# Altium PCB MCXE31B.PcbDoc (part 1 of 3)
Units mil, origin at the board's own origin, x right, y up, seen from the top; angles counter-clockwise.
Board outline 4645.67 x 2165.35 mil, 4 copper layers (TOP, GND, POWER, BOTTOM), stack 60.805 mil thick; 220 components, 156 nets, 796 pads, 319 vias.
Unrouted connection lines stored in the file: 10.
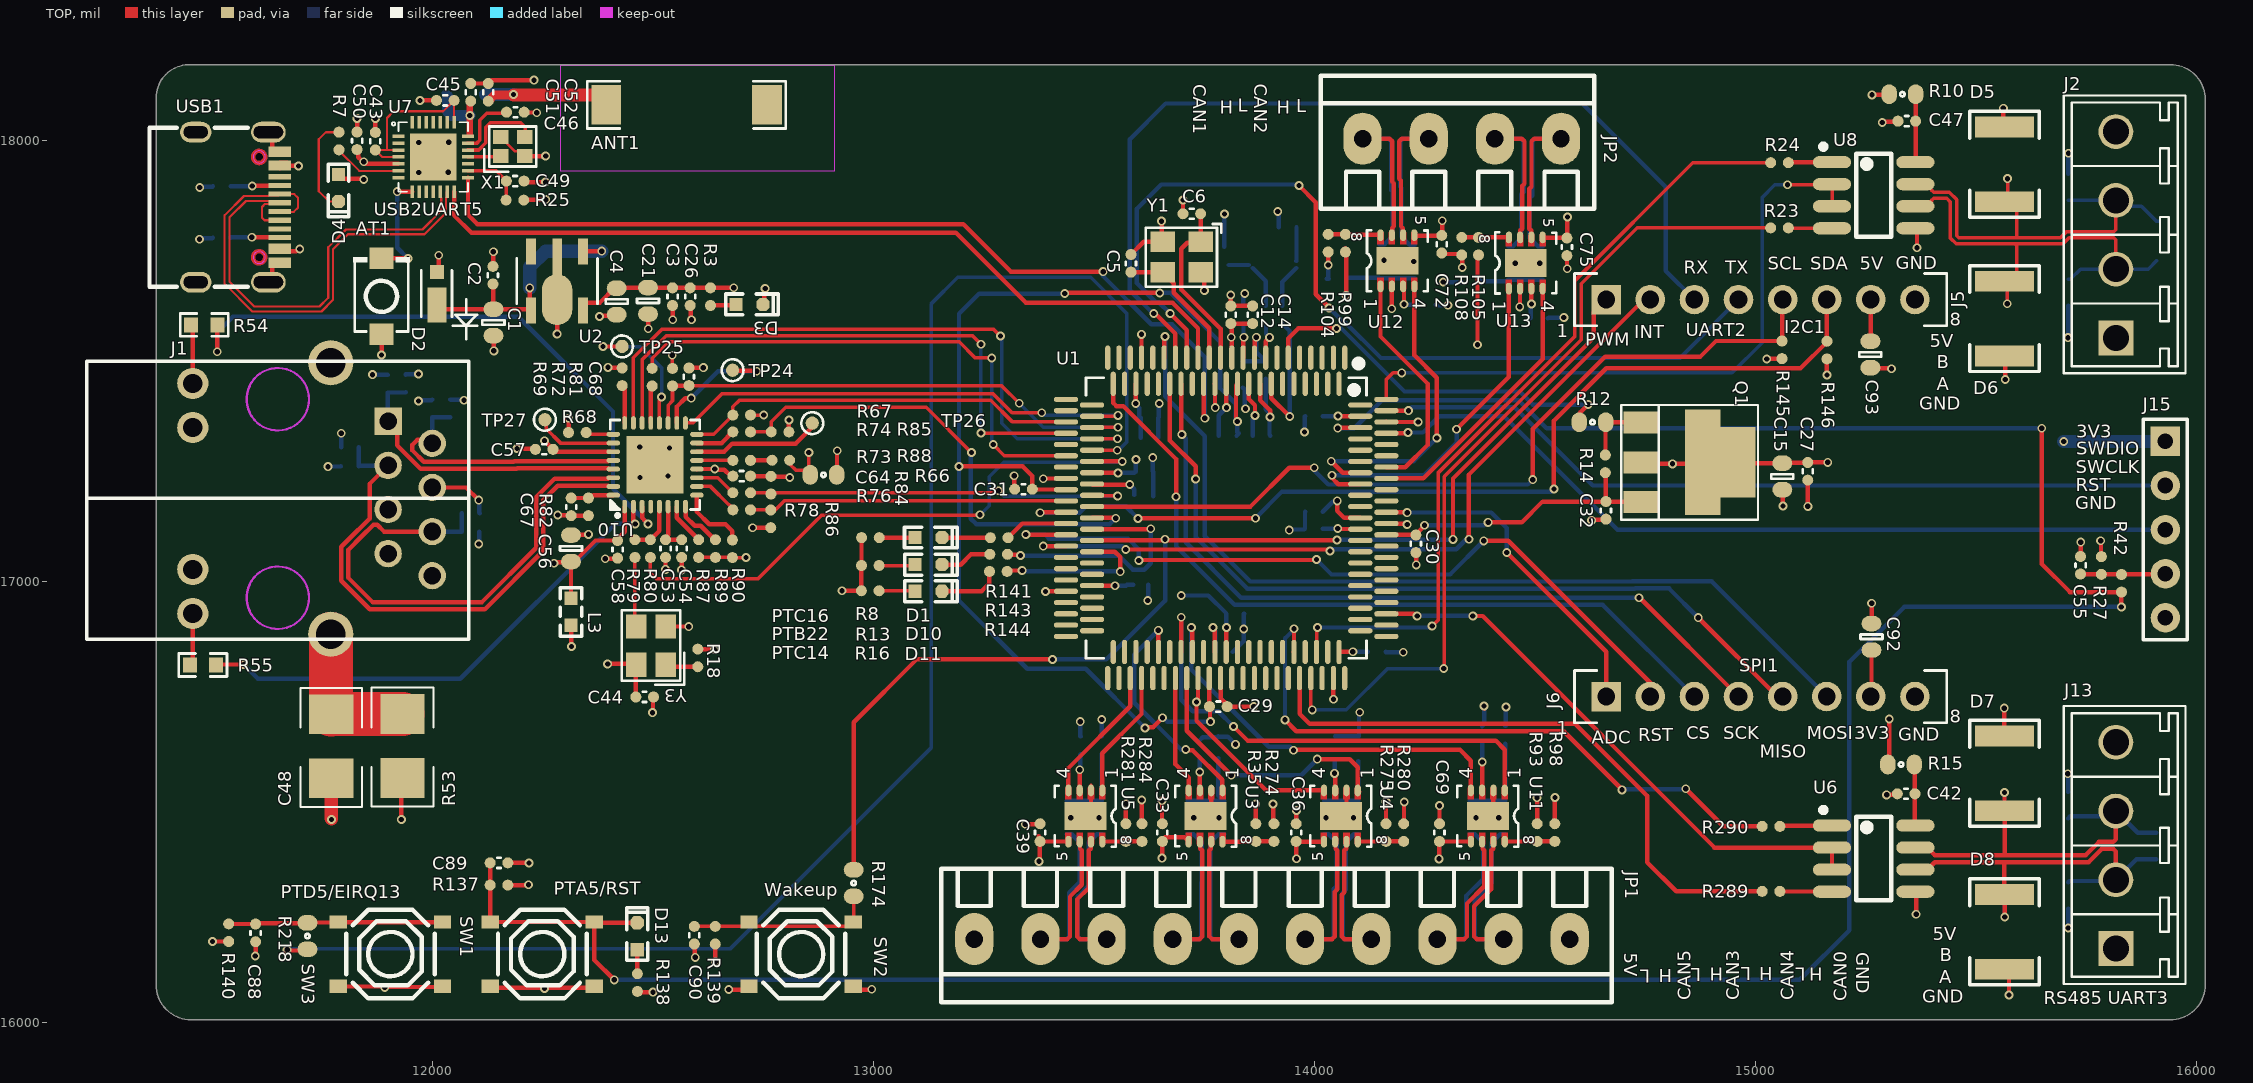
[diagram p0: TOP view]
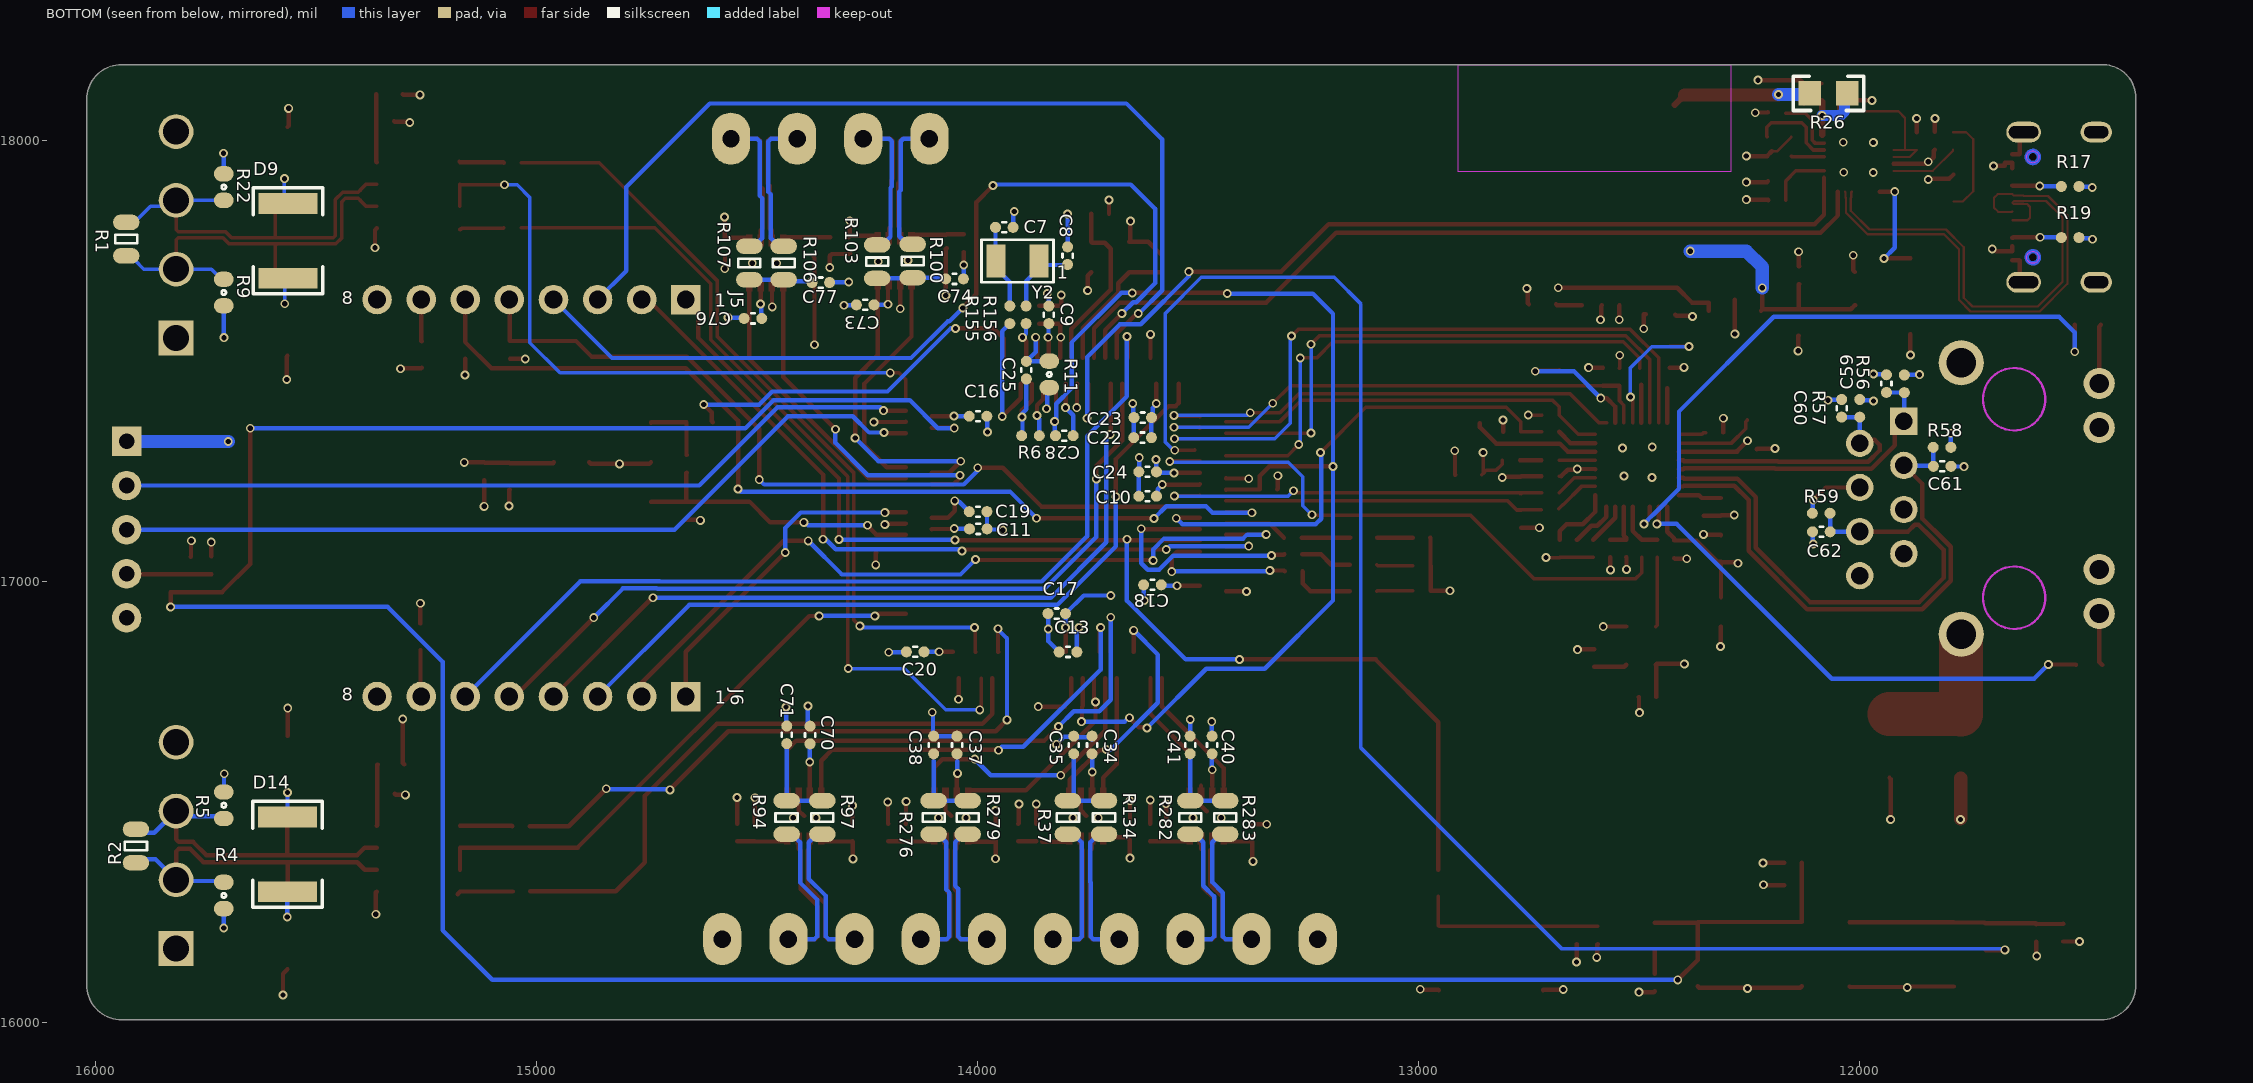
[diagram p1: BOTTOM view, seen from below]
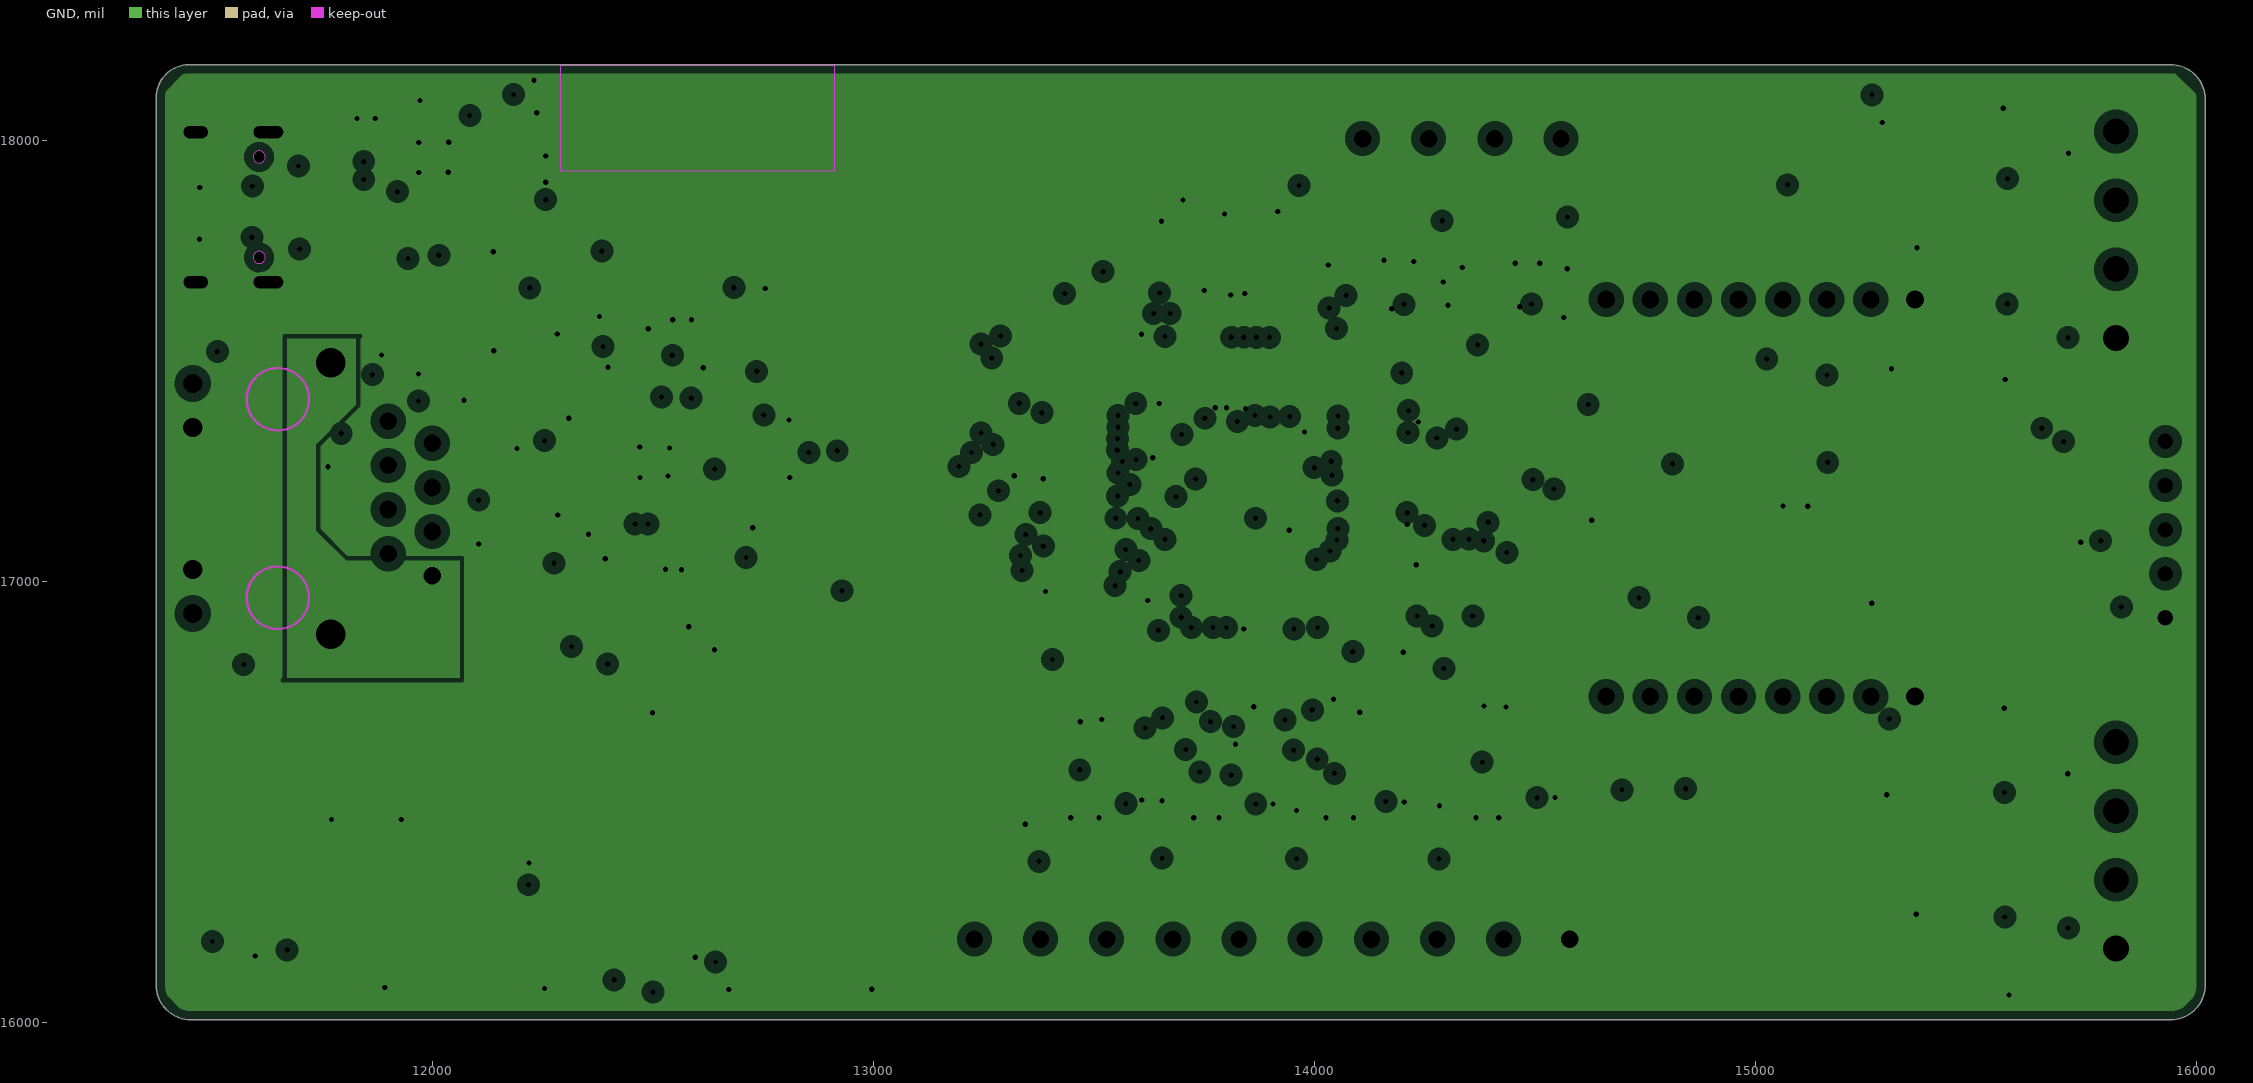
[diagram p2: GND, clearances drawn from the general rule]
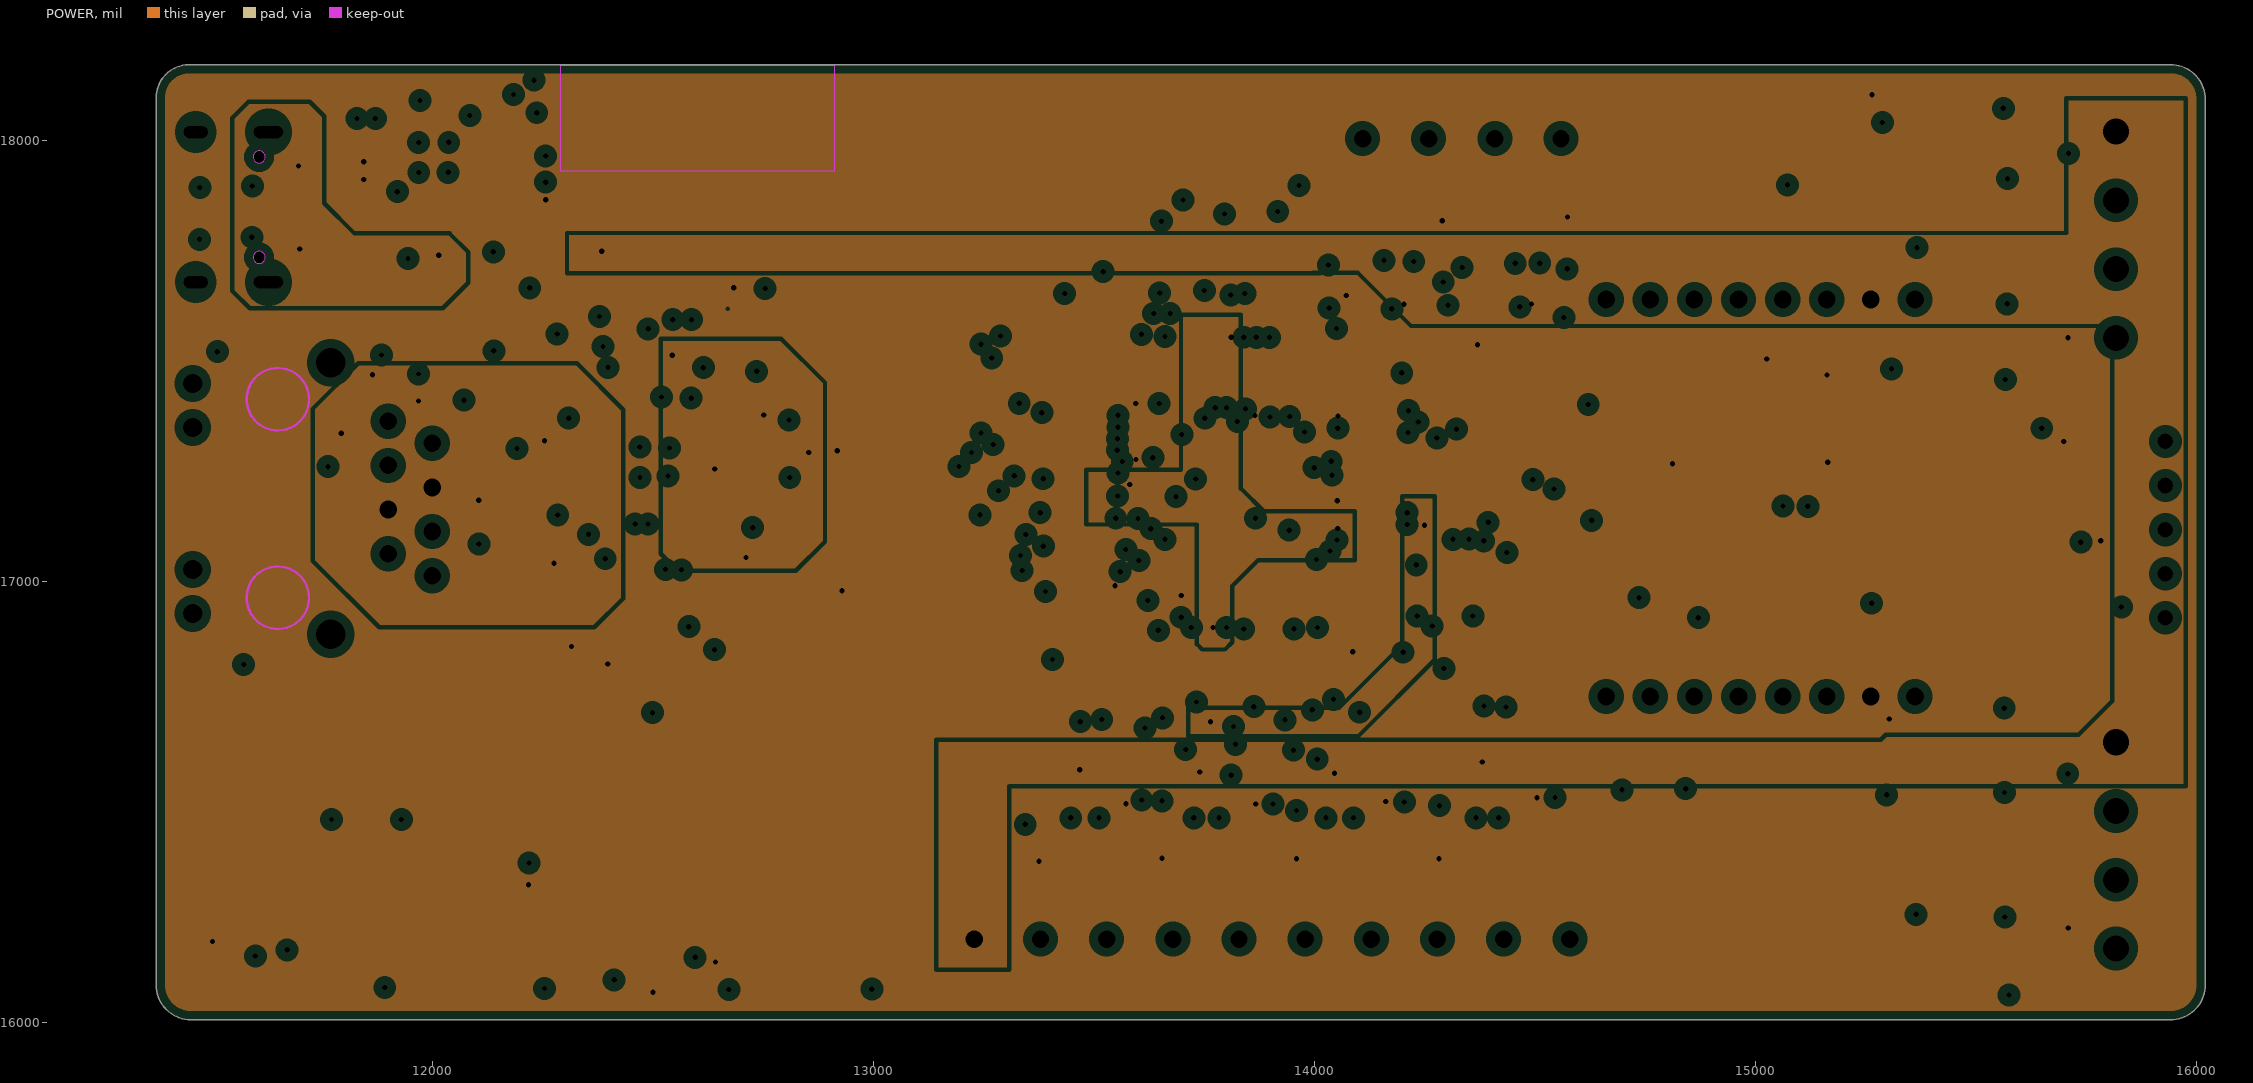
[diagram p3: POWER, clearances drawn from the general rule]

## Layer stack, top to bottom
Top Solder: solder mask 0.4, Solder Resist, Dk 3.5
TOP: signal copper 1.8
Dielectric 1: core 3.0099, FR-4, Dk 4.5
GND: plane copper 1.3779, net (Multiple Nets)
Dielectric2: core 48.4299, FR-4, Dk 3.5
POWER: plane copper 1.3779, net (Multiple Nets)
Dielectric3: core 3.0099, FR-4, Dk 3.5
BOTTOM: signal copper 1.8
Bottom Solder: solder mask 0.4, Solder Resist, Dk 3.5

## Board outline
15803.19,18172.68 15940.99,18172.68 cw(c15940.99,18093.94) 16019.73,18093.94 16019.73,16086.06 cw(c15940.99,16086.06) 15940.99,16007.32 15822.88,16007.32 11826.82,16007.32 11452.8,16007.32 cw(c11452.8,16086.06) 11374.06,16086.06 11374.06,18097.24 cw(c11449.56,18097.24) 11446.32,18172.68

## Design rules (kind name [scope] priority, off if disabled: settings)
Clearance [All] p1: gap=6 ignorepadtopadclearanceinfootprint=TRUE except(0: Arc-Text Arc-Hole Track-Text Track-Hole SMDPad-Text SMDPad-Hole THPad-Text THPad-Hole Via-Text Via-Hole Fill-Text Fill-Hole Poly-Text Poly-Hole Region-Text Region-Hole Text-Text Text-Hole; 2: Arc-SMDPad Track-SMDPad SMDPad-SMDPad)
ComponentClearance [All] p1: gap=0 collisioncheckmode=3 verticalgap=0 showdistances=FALSE
DiffPairsRouting [All] p1: maxlimit=10 minlimit=6 mostfreqgap=10 toplayer_prefgap=6 toplayer_minwidth=3 toplayer_maxwidth=15 toplayer_prefwidth=5 bottomlayer_minwidth=3 bottomlayer_maxwidth=15 bottomlayer_prefwidth=15 maxuncoupledlength=500
HoleToHoleClearance [All] p1: gap=5 allowstackedmicrovias=TRUE
MinimumSolderMaskSliver [All] p1: minsoldermaskwidth=0
PlaneClearance [All] p1: clearance=20
PlaneConnect [All] p1: planeconnectstyle=Direct reliefexpansion=20 reliefentries=4 reliefconductorwidth=10 reliefairgap=10
PolygonConnect [All] p1: connectstyle=Direct reliefconductorwidth=10 reliefentries=4 polygonreliefangle="90 Angle" airgapwidth=10
RoutingVias [All] p1: holewidth=12 width=20 viastyle="Through Hole" minholewidth=0 minwidth=0 maxholewidth=50 maxwidth=100
SilkToSilkClearance [All] p1: silktosilkclearance=0
SilkToSolderMaskClearance [IsPad] p1: minsilkscreentomaskgap=0 clearancetoexposedcopper=TRUE
SolderMaskExpansion [All] p1: expansion=4
Width [All] p1: maxlimit=100 minlimit=3 preferedwidth=8 minimp=50.000000 maximp=50.000000 favimp=50.000000
22 further rules are at their usual default settings.

## Classes and differential pairs
component class UART2: C47 D5 D6 D9 J2 R1 R9 R10 R22 R23 R24 U8
component class UART: ANT1 AT1 C42 C43 C45 C46 C49 C50 C51 C52 D4 D7 D8 D14 J13 R2 R4 R5 R7 R15 R17 R19 R25 R26 R289 R290 U6 U7 USB1 X1
component class CAN1: C33 C34 C35 C36 C37 C38 C39 C40 C41 JP1 R35 R37 R134 R274 R275 R276 R279 R280 R281 R282 R283 R284 TP21 TP38 TP39 TP41 TP42 TP44 U3 U4 U5
component class "13 HEADERS": C92 C93 J5 J6 R145 R146
component class "12 SWITCH & LED": C88 C89 C90 D1 D10 D11 D13 R8 R13 R16 R137 R138 R139 R140 R141 R143 R144 SW1 SW2 SW3
component class "10 CAN": C69 C70 C71 C72 C73 C74 C75 C76 C77 JP2 R93 R94 R97 R98 R99 R100 R103 R104 R105 R106 R107 R108 TP28 TP30 TP31 TP33 TP34 TP36 U11 U12 U13
component class "09 ETHERNET_ENET": C44 C48 C53 C54 C56 C57 C58 C59 C60 C61 C62 C64 C67 C68 J1 L3 R18 R53 R54 R55 R56 R57 R58 R59 R66 R67 R68 R69 R72 R73 R74 R76 R78 R79 R80 R81 R82 R84 R85 R86 R87 R88 R89 R90 TP22 TP23 TP24 TP25 TP26 TP27 TP45 U10 Y3 Y4
component class "08 MCU_LINK_DEBUG": C55 J15 R27
component class "06 MCU_PORT": R42 R174 R218
component class "05 MCU_C": C5 C6 C7 C8 C9 C10 C11 C12 C13 C14 C15 C16 C17 C18 C19 C20 C21 C22 C23 C24 C25 C26 C27 C28 C29 C30 C31 C32 Q1 R6 R11 R12 R14 R155 R156 TP12 TP14 TP46 TP47 Y1 Y2
component class "04 MCU_AB": U1
component class "03 POWER": C1 C2 C3 C4 D2 D3 J10 R3 U2

## Components (designator, comment, footprint, x,y, rotation, side; value= is the part's Value field where it differs from the comment)
ANT1 "AN9520-245" ANT-SMD_L9.5-W2.1 12576.75,18081.3 r0 top
AT1 "TS-1088-AR02016" SW-SMD_L3.9-W3.0-P4.45 11884.9,17647.3 r90 top
C1 "4.7uF" CC0603_OV 12138.7,17588.1 r270 top
C2 "0.1uF" CC0402_25 12137.55,17695.2 r90 top
C3 "0.1uF" CC0402_25 12544.7,17646.65 r270 top
C4 "4.7uF" CC0603_OV 12418.1,17635.85 r270 top
C5 "10pF" CC0402_25 13584.15,17722.1 r90 top
C6 "10pF" CC0402_25 13722,17834.5 r180 top
C7 "10pF" CC0402_25 13939.45,17803.75 r180 bottom
C8 "10pF" CC0402_25 13795.95,17739.5 r90 bottom
C9 "0.22uF" CC0402_25 13838.5,17605.5 r90 bottom
C10 "2.2uF" CC0402_25 13614.5,17194.15 r0 bottom
C11 "0.22uF" CC0402_25 13998.45,17120.05 r180 bottom
C12 "0.22uF" CC0402_25 13810.5,17605.5 r90 top
C13 "0.22uF" CC0402_25 13795,16841 r0 bottom
C14 "0.22uF" CC0402_25 13860,17605.5 r90 top
C15 "10uF" CC0603_OV 15060.95,17239.1 r270 top
C16 "0.22uF" CC0402_25 13999,17375.5 r180 bottom
C17 "0.22uF" CC0402_25 13820.5,16928 r0 bottom
C18 "0.22uF" CC0402_25 13603.55,16993.2 r0 bottom
C19 "0.22uF" CC0402_25 13998.9,17159.1 r180 bottom
C20 "0.22uF" CC0402_25 14141.4,16841.3 r0 bottom
C21 "10uF" CC0603_OV 12489.2,17637.15 r270 top
C22 "0.22uF" CC0402_25 13626,17326.95 r0 bottom
C23 "0.22uF" CC0402_25 13625.55,17372.45 r0 bottom
C24 "0.22uF" CC0402_25 13614.5,17249.5 r0 bottom
C25 "0.22uF" CC0402_25 13889.5,17480 r90 bottom
C26 "1uF" CC0402_25 12584.7,17646.65 r270 top
C27 "0.22uF" CC0402_25 15118.45,17250.7 r270 top
C28 "0.22uF" CC0402_25 13803.35,17331.35 r180 bottom
C29 "0.22uF" CC0402_25 13782.15,16717.1 r0 top
C30 "0.22uF" CC0402_25 14230.05,17086.3 r270 top
C31 "0.22uF" CC0402_25 13340.45,17210.1 r180 top
C32 "2.2uF" CC0402_25 14661,17162 r270 top
C33 "1uF" CC0402_25 13655.24,16431.55 r90 top
C34 "1uF" CC0402_25 13740.55,16630.16 r90 bottom
C35 "0.01UF" CC0402_25 13782.05,16630.16 r90 bottom
C36 "1uF" CC0402_25 13958.65,16431.55 r90 top
C37 "1uF" CC0402_25 14046.65,16630.16 r90 bottom
C38 "0.01UF" CC0402_25 14099.55,16630.16 r90 bottom
C39 "1uF" CC0402_25 13378,16431.55 r90 top
C40 "1uF" CC0402_25 13468.35,16630.16 r90 bottom
C41 "0.01UF" CC0402_25 13518.09,16630.16 r90 bottom
C42 "100nF" CC0402_25 15341.5,16519.5 r180 top
C43 "2.2uf,±5%" CC0402_25 11871,17999 r270 top
C44 "0.1uF" CC0402_25 12481.5,16739 r0 top
C45 "0.1uf,±5%" CC0402_25 12029.5,18091.5 r180 top
C46 "2.2uf,±5%" CC0402_25 12188.4,18064.75 r0 top
C47 "100nF" CC0402_25 15343,18044.5 r180 top
C48 "10nF 500V" 1210 11771,16699.5 r270 top
C49 "2.2uf,±5%" CC0402_25 12188,17908.5 r180 top
C50 "2.2uf,±5%" CC0402_25 11829.5,18000 r270 top
C51 "2.2uf,±5%" CC0402_25 12087.25,18109.9 r90 top
C52 "2.2uf,±5%" CC0402_25 12127,18109.9 r90 top
C53 "470pF" CC0402_25 12529,17075.5 r270 top
C54 "1uF" CC0402_25 12565.5,17075.5 r270 top
C55 "0.1uF" CC0402_25 15736.9,17037.65 r90 top
C56 "22uF" CC0603_OV 12314.5,17076 r90 top
C57 "0.1uF" CC0402_25 12253.8,17300.45 r180 top
C58 "0.1uF" CC0402_25 12420.25,17073.65 r270 top
C59 "15PF" CC0402_25 11939.5,17449.5 r90 bottom
C60 "15PF" CC0402_25 12041,17393.5 r90 bottom
C61 "15PF" CC0402_25 11813,17262 r180 bottom
C62 "15PF" CC0402_25 12087,17113.5 r0 bottom
C64 "0.1uF" CC0402_25 12701.5,17239.75 r0 top
C67 "100PF" CC0402_25 12315,17170 r270 top
C68 "10uF" CC0402_25 12582,17464.95 r90 top
C69 "1uF" CC0402_25 14283.5,16431.55 r90 top
C70 "1uF" CC0402_25 14379.9,16652.7 r90 bottom
C71 "0.01UF" CC0402_25 14432.65,16653.2 r90 bottom
C72 "1uF" CC0402_25 14288.75,17765.45 r270 top
C73 "1uF" CC0402_25 14254.8,17628 r0 bottom
C74 "0.01UF" CC0402_25 14052.2,17686.85 r180 bottom
C75 "1uF" CC0402_25 14572.35,17759.45 r270 top
C76 "1uF" CC0402_25 14509.3,17597.2 r0 bottom
C77 "0.01UF" CC0402_25 14355.45,17678.55 r180 bottom
C88 "0.1uF" CC0402_25 11599.55,16204.1 r270 top
C89 "0.1uF" CC0402_25 12151.3,16362.9 r0 top
C90 "0.1uF" CC0402_25 12594.1,16198.9 r270 top
C92 "10uF" CC0603_OV 15263,16875.5 r90 top
C93 "10uF" CC0603_OV 15260.5,17515.5 r270 top
D1 "POWER LED" "LED 0603R" 13124.8,17100.5 r0 top
D2 "MSS1P3L" SMB_2P7X1P4 12010.3,17653.35 r90 top
D3 "POWER LED" "LED 0603R" 12719.3,17629 r0 top
D4 "" "LED 0603R" 11787.5,17893 r270 top
D5 "SMBJ6.5CA" 1812 15564.5,17946.5 r270 top
D6 "SMBJ6.5CA" 1812 15564.5,17597 r90 top
D7 "SMBJ6.5CA" 1812 15564.5,16565.85 r270 top
D8 "SMBJ6.5CA" 1812 15564.5,16206.5 r90 top
D9 "SMBJ6.5CA" 1812 15563.5,17773 r90 bottom
D10 "POWER LED" "LED 0603R" 13125.3,17039.05 r0 top
D11 "POWER LED" "LED 0603R" 13125.3,16978.8 r0 top
D13 "POWER LED" "LED 0603R" 12464.55,16196.55 r90 top
D14 "SMBJ6.5CA" 1812 15564.5,16382 r90 bottom
J1 "HR911105A" RJ45-HR911105A 11885,17189 r180 top
J2 "CON-4" GSP003RC-4-3.5 15817.13,17709 r90 top
J5 "SKT_1X8" CON_1X8_SKT_2P54_TH_126L 15011.48,17639.95 r90 top locked
J6 "SKT_1X8" CON_1X8_SKT_2P54_TH_126L 15011.48,16739.95 r90 top locked
J13 "CON-4" GSP003RC-4-3.5 15817.13,16324.5 r90 top
J15 "HDR_1X5" HDR2.54-Y-LI-5P 15929.35,17118.35 r270 top
JP1 "HDR-1X10" KF128-3.81-10P 13903.9,16190.1 r180 top
JP2 "HDR-1X4" KF128-3.81-4P 14334.2,18004.75 r0 top
L3 "100 OHM@100MHZ" "L 0603_L" 12314.5,16932 r90 top
Q1 "BCP56-16TX" SOT223 14740.5,17361 r270 top
R1 "120Ω" RC0805_OV 15930.15,17777.1 r90 bottom
R2 "120Ω" RC0805_OV 15908.15,16401.1 r90 bottom
R3 "470" RC0402_25 12630.7,17646.65 r270 top
R4 "4.7k" RC0603_OV 15709,16289 r270 bottom
R5 "4.7k" RC0603_OV 15709,16493.5 r270 bottom
R6 "0" RC0402_25 13880.1,17331.35 r0 bottom
R7 "5k1" RC0402_25 11788.5,17999.5 r90 top
R8 "470" RC0402_25 12993.4,17100.2 r0 top
R9 "4K7" RC0603_OV 15709,17656 r270 bottom
R10 "10K" RC0603_OV 15333,18105.5 r180 top
R11 "0" RC0603_OV 13837.5,17470.5 r90 bottom
R12 "0" RC0603_OV 14630.5,17362 r0 top
R13 "470" RC0402_25 12993.15,17037 r0 top
R14 "2.2K" RC0402_25 14659.5,17267.5 r270 top
R15 "10K" RC0603_OV 15330,16586 r180 top
R16 "470" RC0402_25 12992.95,16979.8 r0 top
R17 "5k1" RC0402_25 11523,17896.5 r180 bottom
R18 "NC" RC0402_25 12602,16827.5 r90 top
R19 "5k1" RC0402_25 11523,17780.5 r0 bottom
R22 "4k7" RC0603_OV 15709,17895 r270 bottom
R23 "0" RC0402_25 15054.45,17802.5 r180 top
R24 "0" RC0402_25 15054.45,17950.3 r180 top
R25 "5k1" RC0402_25 12187.5,17865.5 r180 top
R26 "0" 0805R 12113.3,18107.6 r180 bottom
R27 "10K" RC0402_25 15784.1,17037.1 r270 top
R35 "NC" RC0402_25 13867.24,16431.55 r270 top
R37 "62" RC0805_OV 13795.24,16465.88 r90 bottom
R42 "0" RC0402_25 15829.7,16996.75 r90 top
R53 "1M" 1210 11932.5,16700.5 r270 top
R54 "470Ω" R0603 11483,17582.5 r0 top
R55 "470Ω" R0603 11480,16811.5 r0 top
R56 "49.9" RC0402_25 11899,17449 r270 bottom
R57 "49.9" RC0402_25 12000,17393.5 r270 bottom
R58 "49.9" RC0402_25 11813.5,17305 r0 bottom
R59 "49.9" RC0402_25 12087.5,17155.5 r180 bottom
R66 "0" RC0603_OV 12886.95,17242.6 r0 top
R67 "1.5K" RC0402_25 12701.5,17378 r180 top
R68 "4.7K" RC0402_25 12329,17338.5 r0 top
R69 "4.7K" RC0402_25 12430.65,17464.95 r270 top
R72 "33" RC0402_25 12498.65,17464 r270 top
R73 "33" RC0402_25 12701.5,17275.5 r180 top
R74 "33" RC0402_25 12701.5,17340 r180 top
R76 "33" RC0402_25 12701.5,17202.05 r180 top
R78 "33" RC0402_25 12701.6,17163.25 r180 top
R79 "33" RC0402_25 12459.5,17075.5 r270 top
R80 "0" RC0402_25 12494.5,17075.5 r270 top
R81 "10K" RC0402_25 12544.65,17463.95 r270 top
R82 "12.1K" RC0402_25 12354,17170 r270 top
R84 "NC" RC0402_25 12767.85,17219.25 r90 top
R85 "NC" RC0402_25 12788.5,17340 r0 top
R86 "NC" RC0402_25 12767.45,17142.9 r270 top
R87 "NC" RC0402_25 12604,17075.5 r270 top
R88 "NC" RC0402_25 12790.3,17275.7 r0 top
R89 "NC" RC0402_25 12642,17075.5 r270 top
R90 "4.7K" RC0402_25 12680.5,17075 r270 top
R93 "NC" RC0402_25 14505,16431.55 r270 top
R94 "62" RC0805_OV 14433,16465.88 r90 bottom
R97 "62" RC0805_OV 14352,16465.88 r270 bottom
R98 "100K" RC0402_25 14545,16431.55 r90 top
R99 "NC" RC0402_25 14070.25,17767.9 r90 top
R100 "62" RC0805_OV 14147.25,17727.4 r270 bottom
R103 "62" RC0805_OV 14227.75,17725.9 r90 bottom
R104 "100K" RC0402_25 14031.25,17767.9 r270 top
R105 "NC" RC0402_25 14372,17761 r90 top
R106 "62" RC0805_OV 14439.55,17722.91 r270 bottom
R107 "62" RC0805_OV 14517.55,17722.91 r90 bottom
R108 "100K" RC0402_25 14334,17761 r270 top
R134 "62" RC0805_OV 13713.24,16465.88 r270 bottom
R137 "10K" RC0402_25 12151.3,16312.5 r180 top
R138 "470" RC0402_25 12465.05,16091.55 r90 top
R139 "10K" RC0402_25 12641.6,16198.9 r90 top
R140 "10K" RC0402_25 11538.55,16204.6 r90 top
R141 "470" RC0402_25 13285.35,17100.05 r0 top
R143 "470" RC0402_25 13284.15,17062.5 r0 top
R144 "470" RC0402_25 13283.4,17023.75 r0 top
R145 "4.7K" RC0402_25 15060,17526 r90 top
R146 "4.7K" RC0402_25 15162,17525.5 r90 top
R155 "0" RC0402_25 13927,17605.5 r270 bottom
R156 "0" RC0402_25 13890,17605.5 r270 bottom
R174 "0" RC0603_OV 12955.4,16317.1 r270 top
R218 "0" RC0603_OV 11717.05,16197 r90 top
R274 "100K" RC0402_25 13908.24,16431.55 r90 top
R275 "NC" RC0402_25 14162.45,16431.55 r270 top
R276 "62" RC0805_OV 14099.45,16465.88 r90 bottom
R279 "62" RC0805_OV 14022.45,16465.88 r270 bottom
R280 "100K" RC0402_25 14202.45,16431.55 r90 top
R281 "NC" RC0402_25 13572.6,16431.55 r270 top
R282 "62" RC0805_OV 13517.59,16465.88 r90 bottom
R283 "62" RC0805_OV 13438.59,16465.88 r270 bottom
R284 "100K" RC0402_25 13609.1,16431.55 r90 top
R289 "0" RC0402_25 15035.2,16298.35 r180 top
R290 "0" RC0402_25 15035.2,16445.7 r180 top
SW1 "SW SPST NO" SW-SMD_4P-L5.1-W5.1-P3.70-LS6.5-TL_H1.5 12247.25,16156.4 r180 top
SW2 "SW SPST NO" SW-SMD_4P-L5.1-W5.1-P3.70-LS6.5-TL_H1.5 12834.1,16156.4 r180 top
SW3 "SW SPST NO" SW-SMD_4P-L5.1-W5.1-P3.70-LS6.5-TL_H1.5 11902.9,16156.4 r180 top
TP24 "TPAD_030" TPAD_030 12680.95,17479.85 r270 top
TP25 "TPAD_030" TPAD_030 12430.4,17533.85 r270 top
TP26 "TPAD_030" TPAD_030 12861.55,17359.8 r270 top
TP27 "TPAD_030" TPAD_030 12255.4,17367.55 r270 top
U1 "MCXE31BMPB" QFP-172_L16.0-W16.0-P0.65-LS19.0-TL 13800,17145 r270 top
U2 "XC6227C331PR-G" XC6227C331PR-G 12282.99,17639.7 r90 top
U3 "TJA1057BTK" SON8_0P65_3P15X3P15 13753.35,16469.05 r270 top
U4 "TJA1057BTK" SON8_0P65_3P15X3P15 14059.95,16469.05 r270 top
U5 "TJA1057BTK" SON8_0P65_3P15X3P15 13480.7,16469.05 r270 top
U6 "SP3485" SOP-8 15268,16372.5 r270 top
U7 "CH9143" QFN-28_L4.0-W4.0-P0.40-BL-EP2.7 12002.26,17963.26 r270 top
U8 "SP3485" SOP-8 15268,17876.5 r270 top
U10 "LAN8741A-EN" QFN-32-EP(5x5) 12505.22,17265.47 r0 top
U11 "TJA1057BTK" SON8_0P65_3P15X3P15 14393.11,16469.05 r270 top
U12 "TJA1057BTK" SON8_0P65_3P15X3P15 14188.29,17727.88 r90 top
U13 "TJA1057BTK" SON8_0P65_3P15X3P15 14479.17,17722.84 r90 top
USB1 "KH-TYPE-C-16P" USB-C-SMD_KH-TYPE-C-16P 11654,17804.59 r270 top
X1 "32MHz" CRYSTAL-SMD_4P-L2.0-W1.6-BL 12182.5,17987 r0 top
Y1 "16MHz" X322516MLB4SI 13742.5,17770.9 r180 top
Y2 "32.768KHz" XTAL2-3P2X1P5-SM 13909.5,17727.5 r0 bottom
Y3 "50 MHz" OSC-SMD_4P-L3.2-W2.5-BL 12496,16856.5 r90 top

## Footprints (in the part's own frame and the unit in brackets; to place one, negate y for a bottom-side part, rotate by r counter-clockwise, add the part's x,y. Pads: shape width x height; smd on the part's side, far side on the other; paste and mask are expansions set on the pad)
0805R [mil]
  rect 52x56 smd: 1(0,0) 2(85,0)
  silkscreen extent -37,-39 122,39
1210 [mil]
  rect 90x100 smd: 1(0,0) 2(145,0)
  silkscreen extent -60,-70 210,70
1812 [mm]
  rect 1.2x3.42 smd: 1(-2.15,0) 2(2.15,0)
  silkscreen extent -3.05,-2.01 3.05,2.01, body extent -2.25,-1.6 2.25,1.6, height 0.59
ANT-SMD_L9.5-W2.1 [mm]
  rect 1.71x2.268 smd paste-100 mask+0.051: 1(-4.63,0) 2(4.63,0)
  silkscreen extent -5.71,-1.36 5.71,1.36
CC0402_25 [mil]
  round 25 smd: 1(-20,0) 2(20,0)
  silkscreen extent -4,-12 4,12
CC0603_OV [mil]
  oval 35x45 smd: 1(-30,0) 2(30,0)
  silkscreen extent -5,-25 5,25
CON_1X8_SKT_2P54_TH_126L [mil]
  rect 67x67 / inner round 0 / far side rect 67x67 hole 40: 1(0.05,349.98)
  round 67 / inner round 0 / far side round 67 hole 40: 2(0.05,249.98) 3(0.05,149.98) 4(0.05,49.98) 5(0.05,-50.02) 6(0.05,-150.02) 7(0.05,-250.02) 8(0.05,-350.02)
  silkscreen extent -59,-422 59,422
CRYSTAL-SMD_4P-L2.0-W1.6-BL [mm]
  rect 0.9x0.8 smd paste+0.051: 1(-0.7,-0.55) 2(0.7,-0.55) 3(0.7,0.55) 4(-0.7,0.55)
  silkscreen extent -1.65,-1.45 1.35,1.15
GSP003RC-4-3.5 [mm]
  rect 2x2 hole 1.5: 1(-3.96,0)
  round 2 hole 1.5: 2(0,0) 3(3.96,0) 4(7.92,0)
  silkscreen extent -6,-4 10,3
HDR2.54-Y-LI-5P [mm] "圆孔排母，5脚"
  rect 1.7x1.7 hole 0.9: 1(-5.08,0)
  round 1.7 hole 0.9: 2(-2.54,0) 3(0,0) 4(2.54,0) 5(5.08,0)
  silkscreen extent -6.35,-1.27 6.35,1.27, body extent -6.35,-1.27 6.35,1.27, height 4.31
KF128-3.81-4P [mm] "螺钉式接线端子，脚距3.81mm"
  oval 2.2x3 hole 1: 1(-5.715,0) 2(-1.905,0) 3(1.905,0) 4(5.715,0)
  silkscreen extent -8.13,-4.04 7.62,3.63, body extent -8.12,-3.9 7.62,3.5, height 8.55
KF128-3.81-10P [mm] "螺钉式接线端子，脚距3.81mm"
  oval 2.2x3 hole 1: 1(-17.145,0) 2(-13.335,0) 3(-9.525,0) 4(-5.715,0) 5(-1.905,0) 6(1.905,0) 7(5.715,0) 8(9.525,0) 9(13.335,0) 10(17.145,0)
  silkscreen extent -19.56,-4.04 19.05,3.63, body extent -19.55,-3.9 19.05,3.5, height 8.55
"L 0603_L" [mil] "小功率贴片电感"
  rect 30x30 smd: 1(-30.59,0) 2(30.59,0)
  silkscreen extent -55,-24 55,24, body extent -31,-16 32,16, height 31
"LED 0603R" [mil] "红色0603LED"
  rect 30x30 smd: 1(-30.59,0)
  oct 30x30 smd: 2(30.59,0)
  silkscreen extent -54,-24 65,24, body extent -31,-16 32,16, height 24
OSC-SMD_4P-L3.2-W2.5-BL [mm]
  rect 1.4x1.2 smd: 1(-1.129,-0.848) 2(1.071,-0.848) 3(1.071,0.852) 4(-1.129,0.852)
  silkscreen extent -2.29,-1.91 2,1.68
QFN-28_L4.0-W4.0-P0.40-BL-EP2.7 [mm]
  rect 0.2x0.7 smd paste-100 mask+0.051: 1(-1.2,-2) 2(-0.8,-2) 3(-0.4,-2) 4(-0.001,-2) 5(0.4,-2) 6(0.8,-2) 7(1.2,-2) 15(1.2,2) 16(0.8,2) 17(0.4,2) 18(0,2) 19(-0.4,2) 20(-0.8,2) 21(-1.2,2)
  rect 0.7x0.2 smd paste-100 mask+0.051: 8(2,-1.2) 9(2,-0.8) 10(2,-0.4) 11(1.999,0) 12(2,0.4) 13(2,0.8) 14(2,1.2) 22(-2,1.2) 23(-2,0.8) 24(-2,0.4) 25(-2,0) 26(-2,-0.4) 27(-2,-0.8) 28(-2,-1.2)
  rect 2.7x2.7 smd paste-100 mask+0.051: 29(0,0)
  silkscreen extent -2,-2.38 2,2
QFN-32-EP(5x5) [mm]
  oval 0.28x0.78 smd paste-100 mask+0.051: 1(-1.75,-2.407) 2(-1.25,-2.407) 3(-0.75,-2.407) 4(-0.25,-2.407) 5(0.25,-2.407) 6(0.75,-2.407) 7(1.25,-2.407) 8(1.75,-2.407) 17(1.75,2.407) 18(1.25,2.407) 19(0.75,2.407) 20(0.25,2.407) 21(-0.25,2.407) 22(-0.75,2.407) 23(-1.25,2.407) 24(-1.75,2.407)
  oval 0.78x0.28 smd paste-100 mask+0.051: 9(2.407,-1.75) 10(2.407,-1.25) 11(2.407,-0.75) 12(2.407,-0.25) 13(2.407,0.25) 14(2.407,0.75) 15(2.407,1.25) 16(2.407,1.75) 25(-2.407,1.75) 26(-2.407,1.25) 27(-2.407,0.75) 28(-2.407,0.25) 29(-2.407,-0.25) 30(-2.407,-0.75) 31(-2.407,-1.25) 32(-2.407,-1.75)
  rect 3.3x3.3 smd paste-100 mask+0.051: 33(0,0)
  silkscreen extent -2.58,-3.02 2.58,2.58
QFP-172_L16.0-W16.0-P0.65-LS19.0-TL [mm]
  oval 1.4x0.3 smd paste+0.051: 1(-9.225,6.825) 2(-7.723,6.5) 3(-9.225,6.175) 4(-7.723,5.85) 5(-9.225,5.525) 6(-7.723,5.2) 7(-9.225,4.875) 8(-7.723,4.55) 9(-9.225,4.225) 10(-7.723,3.9) 11(-9.225,3.575) 12(-7.723,3.25) 13(-9.225,2.925) 14(-7.723,2.6) 15(-9.225,2.275) 16(-7.723,1.95) 17(-9.225,1.625) 18(-7.723,1.3) 19(-9.225,0.975) 20(-7.723,0.65) 21(-9.225,0.325) 22(-7.723,0) 23(-9.225,-0.325) 24(-7.723,-0.65) 25(-9.225,-0.975) 26(-7.723,-1.3) 27(-9.225,-1.625) 28(-7.723,-1.95) 29(-9.225,-2.275) 30(-7.723,-2.6) 31(-9.225,-2.925) 32(-7.723,-3.25) 33(-9.225,-3.575) 34(-7.723,-3.9) 35(-9.225,-4.225) 36(-7.723,-4.55) 37(-9.225,-4.875) 38(-7.723,-5.2) 39(-9.225,-5.525) 40(-7.723,-5.85) 41(-9.225,-6.175) 42(-7.723,-6.5) 43(-9.225,-6.825) 87(9.225,-6.825) 88(7.723,-6.5) 89(9.225,-6.175) 90(7.723,-5.85) 91(9.225,-5.525) 92(7.723,-5.2) 93(9.225,-4.875) 94(7.723,-4.55) 95(9.225,-4.225) 96(7.723,-3.9) 97(9.225,-3.575) 98(7.723,-3.25) 99(9.225,-2.925) 100(7.723,-2.6) 101(9.225,-2.275) 102(7.723,-1.95) 103(9.225,-1.625) 104(7.723,-1.3) 105(9.225,-0.975) 106(7.723,-0.65) 107(9.225,-0.325) 108(7.723,0) 109(9.225,0.325) 110(7.723,0.65) 111(9.225,0.975) 112(7.723,1.3) 113(9.225,1.625) 114(7.723,1.95) 115(9.225,2.275) 116(7.723,2.6) 117(9.225,2.925) 118(7.723,3.25) 119(9.225,3.575) 120(7.723,3.9) 121(9.225,4.225) 122(7.723,4.55) 123(9.225,4.875) 124(7.723,5.2) 125(9.225,5.525) 126(7.723,5.85) 127(9.225,6.175) 128(7.723,6.5) 129(9.225,6.825)
  oval 0.3x1.4 smd paste+0.051: 44(-6.825,-9.225) 45(-6.5,-7.723) 46(-6.175,-9.225) 47(-5.85,-7.723) 48(-5.525,-9.225) 49(-5.2,-7.723) 50(-4.875,-9.225) 51(-4.55,-7.723) 52(-4.225,-9.225) 53(-3.9,-7.723) 54(-3.575,-9.225) 55(-3.25,-7.723) 56(-2.925,-9.225) 57(-2.6,-7.723) 58(-2.275,-9.225) 59(-1.95,-7.723) 60(-1.625,-9.225) 61(-1.3,-7.723) 62(-0.975,-9.225) 63(-0.65,-7.723) 64(-0.325,-9.225) 65(0,-7.723) 66(0.325,-9.225) 67(0.65,-7.723) 68(0.975,-9.225) 69(1.3,-7.723) 70(1.625,-9.225) 71(1.95,-7.723) 72(2.275,-9.225) 73(2.6,-7.723) 74(2.925,-9.225) 75(3.25,-7.723) 76(3.575,-9.225) 77(3.9,-7.723) 78(4.225,-9.225) 79(4.55,-7.723) 80(4.875,-9.225) 81(5.2,-7.723) 82(5.525,-9.225) 83(5.85,-7.723) 84(6.175,-9.225) 85(6.5,-7.723) 86(6.825,-9.225) 130(6.825,9.225) 131(6.5,7.723) 132(6.175,9.225) 133(5.85,7.723) 134(5.525,9.225) 135(5.2,7.723) 136(4.875,9.225) 137(4.55,7.723) 138(4.225,9.225) 139(3.9,7.723) 140(3.575,9.225) 141(3.25,7.723) 142(2.925,9.225) 143(2.6,7.723) 144(2.275,9.225) 145(1.95,7.723) 146(1.625,9.225) 147(1.3,7.723) 148(0.975,9.225) 149(0.65,7.723) 150(0.325,9.225) 151(0,7.723) 152(-0.325,9.225) 153(-0.65,7.723) 154(-0.975,9.225) 155(-1.3,7.723) 156(-1.625,9.225) 157(-1.95,7.723) 158(-2.275,9.225) 159(-2.6,7.723) 160(-2.925,9.225) 161(-3.25,7.723) 162(-3.575,9.225) 163(-3.9,7.723) 164(-4.225,9.225) 165(-4.55,7.723) 166(-4.875,9.225) 167(-5.2,7.723) 168(-5.525,9.225) 169(-5.85,7.723) 170(-6.175,9.225) 171(-6.5,7.723) 172(-6.825,9.225)
  silkscreen extent -9.09,-8.08 8.08,8.08
R0603 [mil]
  rect 31.75x34.02 smd paste-3937.01 mask+2: 1(-29.66,0) 2(29.66,0)
  silkscreen extent -55,-26 55,26
RC0402_25 [mil]
  round 25 smd: 1(-20,0) 2(20,0)
RC0603_OV [mil]
  oval 35x45 smd: 1(-30,0) 2(30,0)
  silkscreen extent -5,-5 5,5
RC0805_OV [mil]
  oval 35x60 smd: 1(-38,0) 2(38,0)
  silkscreen extent -10,-25 10,25
RJ45-HR911105A [mm] "HR911105A"
  rect 1.575x1.575 hole 1.016: 1(-0.38,-4.445)
  round 1.575 hole 1.016: 2(-2.92,-3.175) 3(-0.38,-1.905) 4(-2.92,-0.635) 5(-0.38,0.635) 6(-2.92,1.905) 7(-0.38,3.175) 8(-2.92,4.445)
  round 1.8 hole 1.1: 9(10.87,-6.625) 10(10.87,-4.085) 11(10.87,4.085) 12(10.87,6.625)
  round 2.6 hole 1.7: 15(2.92,7.815) 16(2.92,-7.815)
  Keep-Out Layer circle w0.127: c5.97,5.715 r1.798
  Keep-Out Layer circle w0.127: c5.97,-5.715 r1.798
  silkscreen extent -5.02,-7.91 16.98,8.1
SMB_2P7X1P4 [mil]
  rect 32x32 smd: A(49.15,-0.59)
  rect 79x43 smd: C(-25.65,-0.59)
  silkscreen extent -103,-92 53,35
SON8_0P65_3P15X3P15 [mm]
  oval 0.675x0.35 smd: 1(-1.475,0.975) 2(-1.475,0.325) 3(-1.475,-0.325) 4(-1.475,-0.975) 5(1.475,-0.975) 6(1.475,-0.325) 7(1.475,0.325) 8(1.475,0.975)
  rect 1.6x2.413 smd: 9(0,0)
  TOP region: 0.962,1.15 1.637,1.15 1.637,0.8 0.962,0.8
  TOP region: 0.962,0.5 1.637,0.5 1.637,0.15 0.962,0.15
  TOP region: 0.962,-0.15 1.637,-0.15 1.637,-0.5 0.962,-0.5
  TOP region: 0.962,-0.8 1.637,-0.8 1.637,-1.15 0.962,-1.15
  TOP region: -0.962,0.8 -1.637,0.8 -1.637,1.15 -0.962,1.15
  TOP region: -0.962,0.15 -1.637,0.15 -1.637,0.5 -0.962,0.5
  TOP region: -0.962,-0.5 -1.637,-0.5 -1.637,-0.15 -0.962,-0.15
  TOP region: -0.962,-1.15 -1.637,-1.15 -1.637,-0.8 -0.962,-0.8
  silkscreen extent -1.75,-1.75 1.77,1.75
SOP-8 [mm]
  oval 0.7x2.2 smd: 1(-1.905,-2.4) 2(-0.635,-2.4) 3(0.635,-2.4) 4(1.905,-2.4) 5(1.905,2.4) 6(0.635,2.4) 7(-0.635,2.4) 8(-1.905,2.4)
  silkscreen extent -2.95,-3.05 2.4,1, body extent -2.5,-3.1 2.5,3.1, height 1.75
SOT223 [mil]
  rect 50x80 smd: 1(0,0) 2(90,0) 3(180,0)
  rect 160x80 smd: 4(90,220)
  rect 240x80 smd: 4(90,140)
  silkscreen extent -40,-45 220,265
SW-SMD_4P-L5.1-W5.1-P3.70-LS6.5-TL_H1.5 [mm]
  rect 1x0.75 smd paste+0.051: 1(-3.056,1.86) 2(2.944,1.86) 3(-3.056,-1.84) 4(2.944,-1.84)
  silkscreen extent -2.61,-2.54 2.49,2.56
SW-SMD_L3.9-W3.0-P4.45 [mm]
  rect 1.23x1.36 smd paste+0.051: 1(-2.185,0) 2(2.185,0)
  silkscreen extent -2.03,-1.62 2.25,1.62
TPAD_030 [mil]
  round 30 smd: 1(0,0)
  silkscreen extent -25,-25 25,25, body extent -15,-15 15,15, height 150
USB-C-SMD_KH-TYPE-C-16P [mm]
  oval 1.2x2 hole 0.7 slot 1.7 at 90 deg: 1(-5.46,-0.65) 2(3.18,-0.65)
  oval 1.2x1.8 hole 0.7 slot 1.4 at 90 deg: 3(-5.46,-4.83) 4(3.18,-4.83)
  rect 0.3x1.3 smd paste-100 mask+0.05: A1(-4.49,0) A4(-3.69,0) A5(-2.39,0) A6(-1.39,0) A7(-0.89,0) A8(0.11,0) A9(1.41,0) A12(2.21,0) B1(1.91,0) B4(1.11,0) B5(0.61,0) B6(-0.39,0) B7(-1.89,0) B8(-2.89,0) B9(-3.39,0) B12(-4.19,0)
  Keep-Out Layer board cut-out: -3.68,-1.18 -3.715,-1.028 -3.812,-0.906 -3.952,-0.839 -4.108,-0.839 -4.248,-0.906 -4.345,-1.028 -4.38,-1.18 -4.38,-1.18 -4.345,-1.332 -4.248,-1.454 -4.108,-1.521 -3.952,-1.521 -3.812,-1.454 -3.715,-1.332 -3.68,-1.18
  Keep-Out Layer board cut-out: 2.1,-1.18 2.065,-1.028 1.968,-0.906 1.828,-0.839 1.672,-0.839 1.532,-0.906 1.435,-1.028 1.4,-1.18 1.4,-1.18 1.435,-1.332 1.532,-1.454 1.672,-1.521 1.828,-1.521 1.968,-1.454 2.065,-1.332 2.1,-1.18
  Multi-Layer circle w0.254: c-4.03,-1.18 r0.35
  Multi-Layer circle w0.254: c1.75,-1.18 r0.35
  silkscreen extent -5.71,-7.5 3.43,-1.84
X322516MLB4SI [mm]
  rect 1.4x1.2 smd paste+0.051: 1(0,0) 2(2.2,0) 3(2.2,1.75) 4(0,1.75)
  silkscreen extent -1.19,-1.03 3.17,2.6
XC6227C331PR-G [mm]
  rect 1.5x0.574 smd paste-100 mask+0.051: 1(2.765,-1.5) 3(2.765,1.5) 4(-0.63,1.5) 5(-0.63,-1.5)
  oval 2.94x1.76 smd paste-100 mask+0.051: 2(0,0)
  rect 2.209x0.552 smd paste-100 mask+0.051: 2(2.41,0)
  silkscreen extent -0.23,-2.33 2.37,2.33
XTAL2-3P2X1P5-SM [mil]
  rect 43x75 smd: 1(-49.21,0.02) 2(49.21,0.02)
  silkscreen extent -82,-48 82,48

## Part data
ANT1: "2.4G陶瓷天线/适用于WIFI蓝牙", JLCPCB Part Class=扩展, Manufacturer=rainsun(ÁØêÅÎ, AddInBom=yes, ConvertToPcb=yes, Datasheet=https://atta.szlcsc.com/upload/public/pdf/source/20170425/1493115807294.pdf, Device=AN9520-245, FootprintName=ANT-SMD_L9.5-W2.1, LCSC Part Name=AN9520-245, Manufacturer Part=AN9520-245, ModelId=396f7a811e674750a977a0c0cdc4ad7a, ModelName=ANT-SMD_L9.5-W2.1-H1.0, ModelTransform=374.015,82.677,0,0,0,0,0.005,0,0, Supplier=LCSC, Supplier Footprint=SMD,2.1x9.5mm, Supplier Part=C99665, Symbol=AN9520-245
AT1: "电路结构:单刀单掷;按钮形状:圆形按钮;作用力:160gf;安装方式:立贴;开关长度:4mm;开关宽度:3mm;开关高度:2mm;带支架:不带;触点电流:50mA;额定电压(DC)"
C1 C4: library part CAP_NP, "CAP CER 4.7uF 10V 20% X5R 0603", Package Size=0603, Package Type=WCAP-CSGP_0603, Rated Voltage=10V, Temp Range="-55C TO 85C", Tolerance=20%, 3D_Mechanical_Footprint_File=http://fcl.am.freescale.net/ALLEGRO/step/cc0603_ov.STEP, AGILE_PN=150-81893, CAD_APPROVED=Yes, CLASS=DISCRETE, FPLIST=CC0603_OV,CC0603,0603_CC, HEIGHT=0.87, MFG_NAME01="WURTH ELEKTRONIK", MFG_PN01=885012106012, RoHS=Yes, ROOM=CPU, SIGNAL_MODEL=DEFAULT_CAPACITOR_220000pF_2_1, TOL=10%, VOLTAGE=10V, WVDC=10V
C2: library part CAP_NP, "CAP CER 0.1UF 16V 10% X7R 0402", Rated Voltage=16V, Temp Range="-55C to +125C", Tolerance=10%, 3D_Mechanical_Footprint_File=http://fcl.am.freescale.net/ALLEGRO/step/cc0402_25.STEP, AGILE_PN=150-75182, CAD_APPROVED=Yes, CLASS=DISCRETE, FPLIST=CC0402_25,CC0402_HD,0402_CC,CAPC0402_L,cc0402_lamp3, HEIGHT=0.635mm, MFG_NAME01="Samsung Electro-Mechanics", MFG_PN01=CL05B104KO5NNNC, RoHS=NULL
C3 C44 C55 C57 C58 C64 C88 C89 C90: library part CAP_NP, "CAP CER 0.1UF 16V 10% X7R 0402", Rated Voltage=16V, Temp_Range="-55°C to +85°", Temp Range="-55C to +125C", Tolerance=10%, 3D_Mechanical_Footprint_File=http://fcl.am.freescale.net/ALLEGRO/step/cc0402_25.STEP, AGILE_PN=150-75182, CAD_APPROVED=Yes, CLASS=DISCRETE, FPLIST=CC0402_25,CC0402_HD,0402_CC,CAPC0402_L,cc0402_lamp3, HEIGHT=0.635mm, MFG_NAME01="Samsung Electro-Mechanics", MFG_PN01=CL05B104KO5NNNC, RoHS=NULL, SIGNAL_MODEL=DEFAULT_CAPACITOR_100000pF_2_1, TOL=10%, VOLTAGE=16V
C5 C6 C7 C8: library part CAP_NP, "CAP CER 10pF 50V 5% C0G AEC-Q200 0402", Package Size="0402 [1005 Metric]", Package Type=SMD/SMT, Rated Voltage=50V, Temp Range="-55C to +125C", Tolerance=5%, 3D_Mechanical_Footprint_File=http://fcl.am.freescale.net/ALLEGRO/step/cc0402_25.STEP, AGILE_PN=150-79023, CAD_APPROVED=Yes, CLASS=DISCRETE, FPLIST=CC0402_25,CC0402_HD,0402_CC,capc0402_l, HEIGHT=0.55, MFG_NAME01=MURATA, MFG_PN01=GCM1555C1H100JA16, RoHS=Yes, VOLTAGE=50V
C9 C11 C12 C13 C14 C16 C17 C18 C19 C20 C22 C23 C24 C25 C27 C28 C29 C30 C31: library part CAP_NP, "CAP CER 0.22UF 16V 10% X7R 0402", Package Size="0402 [1005 Metric]", Package Type=SMD/SMT, Rated Voltage=16V, Temp Range="-55C to +125C", Tolerance=10%, 3D_Mechanical_Footprint_File=http://fcl.am.freescale.net/ALLEGRO/step/cc0402_25.STEP, AGILE_PN=150-78886, CAD_APPROVED=Yes, CLASS=DISCRETE, FPLIST=CC0402_25,CC0402_HD,0402_CC, HEIGHT=0.55, MFG_NAME01=FENGHUA, MFG_PN01=0402B224K160NT, RoHS=Yes, VOLTAGE=16V
C10 C32: library part CAP_NP, "CAP CER 2.2UF 10V 20% X5R 0402", Rated Voltage=10V, Temp Range="-55C to +85C", Tolerance=20%, 3D_Mechanical_Footprint_File=http://fcl.am.freescale.net/ALLEGRO/step/cc0402_25.STEP, AGILE_PN=150-79665, CAD_APPROVED=Yes, CLASS=DISCRETE, FPLIST=CC0402_25,CC0402_HD,0402_CC,capc0402_l, HEIGHT=0.55, MFG_NAME01=KEMET, MFG_PN01=C0402C225M8PACTU, RoHS=Yes
C15 C21 C68 C92 C93: library part CAP_NP, "CAP CER 10uF 25V 20% X5R 0603", Package Size=0603, Rated Voltage=25V, Temp Range="-55C to +85C", Tolerance=20%, AGILE_PN=150-79272, CAD_APPROVED=Yes, CLASS=DISCRETE, FPLIST=CC0603_OV,CC0603,0603_cc_tol, HEIGHT=1, MFG_NAME01=MURATA, MFG_PN01=GRM188R61E106MA73D, RoHS=Yes
C26 C33 C34 C36 C37 C39 C40 C69 C70 C72 C73 C75 C76: library part CAP_NP, "CAP CER 1.0uF 16V 10% X6S 0402", Rated Voltage=16V, Temp_Range="-55°C to +125°", Temp Range="-55C to +105C", Tolerance=10%, AGILE_PN=150-80262, CAD_APPROVED=Yes, CLASS=DISCRETE, FPLIST=CC0402_25,CC0402_HD,0402_CC,capc0402_l, HEIGHT=0.55, MFG_NAME01=MURATA, MFG_PN01=GRM155C81C105KE11D, RoHS=Yes, SIGNAL_MODEL=DEFAULT_CAPACITOR_1e+06pF_2_1, VOLTAGE=16V
C35 C38 C41 C71 C74 C77: library part CAP_NP, "CAP CER 0.01UF 50V 10% X7R 0402", Rated Voltage=50V, Temp Range="-55C to +125C", Tolerance=10%, AGILE_PN=150-30114, ASSY_OPT=DNP, CAD_APPROVED=Yes, CLASS=DISCRETE, FPLIST=CC0402_25,CC0402_HD,0402_CC,capc0402_l, HEIGHT=0.55MM, MFG_NAME01=MURATA, MFG_PN01=GRM155R71H103KA88D, RoHS=NULL
C42 C47: library part CAP, "Capacitor"
C43 C45 C46 C49 C50 C51 C52: library part CAP1, "Capacitor", ComponentLink1Description=ErpDataInfo, ComponentLink1URL=http://erp.zlgmcu.com/ErpExt/ErpData/ListMateriel.aspx?pkey=1.02.01.0032, RoHS=RoHS, 厂商=muRat, 名称=µ, 器件优选方案=量产, 型号=104,±10%,50V,X, 封装=060, 物料代码=1.02.01.0, 设备封装名称=C0603_104_X7R_50
C48: library part CAP
C53: library part CAP_NP, "CAP CER 470pF 50V 5% C0G 0402", Package Size=0402, Rated Voltage=50V, Temp Range="-55C to +125C", Tolerance=5%, AGILE_PN=150-30004, CAD_APPROVED=YES, CLASS=DISCRETE, FPLIST=CC0402_25,CC0402_HD,0402_CC,capc0402_l, HEIGHT=0.55, MFG_NAME01=MURATA, MFG_PN01=GRM1555C1H471JA01D, RoHS=NULL
C54: library part CAP_NP, "CAP CER 1.0uF 16V 10% X6S 0402", Rated Voltage=16V, Temp Range="-55C to +105C", Tolerance=10%, AGILE_PN=150-80262, CAD_APPROVED=Yes, CLASS=DISCRETE, FPLIST=CC0402_25,CC0402_HD,0402_CC,capc0402_l, HEIGHT=0.55, MFG_NAME01=MURATA, MFG_PN01=GRM155C81C105KE11D, RoHS=Yes, VOLTAGE=16V
C56: library part CAP_NP, "CAP CER 22uF 10V 20% X5R 0603", Package Size="0603 [1608 Metric]", Package Type=SMD/SMT, Rated Voltage=10V, Temp Range="-55°C to 85°", Tolerance=20%, 3D_Mechanical_Footprint_File=http://fcl.am.freescale.net/ALLEGRO/step/cc0603_ov.STEP, AGILE_PN=150-79530, ASSY_OPT=DNP, CAD_APPROVED=Yes, CLASS=DISCRETE, FPLIST=CC0603_OV,CC0603,0603_cc_tol, HEIGHT=1.05mm, MFG_NAME01=SAMSUNG, MFG_PN01=CL10A226MP7LUNC, RoHS=NULL
C59 C60 C61 C62: library part CAP_NP, "CAP CER 15pF 50V 5% C0G 0402", Package Size="0402 (1005 Metric)", Package Type="Surface Mount, MLCC", Rated Voltage=50V, Temp Range="-55°C ~ 125°", Tolerance=5%, 3D_Mechanical_Footprint_File=http://fcl.am.freescale.net/ALLEGRO/step/cc0402_25.STEP, AGILE_PN=150-81667, ASSY_OPT=DNP, CAD_APPROVED=Yes, CLASS=DISCRETE, FPLIST=CC0402_25,CC0402_HD,0402_CC,capc0402_l, HEIGHT=0.55, MFG_NAME01="Murata Electronics", MFG_PN01=GJM1555C1H150JB01D, RoHS=Yes
C67: library part CAP_NP, "CAP CER 100pF 16V 10% X7R 0402", Package Size=0402, Package Type="7\" Reel", Rated Voltage=16V, Temp Range="-55C to +125C", Tolerance=10%, AGILE_PN=150-79188, CAD_APPROVED=Yes, CLASS=DISCRETE, FPLIST=CC0402_25,CC0402_HD,0402_CC,capc0402_l, HEIGHT=0.56, MFG_NAME01=AVX, MFG_PN01=0402YC101KAT2A, RoHS=Yes
D1 D3 D4 D10 D11 D13: library part LED-SMT
D2: library part DIODE_SCHTKY, "DIODE SCH 1A 30V MICROSMP SMT", Rated Voltage=30V, 3D_Mechanical_Footprint_File=http://fcl.am.freescale.net/ALLEGRO/step/smb_2p7x1p4.step, AGILE_PN=480-76978, CAD_APPROVED=Yes, CLASS=IC, HEIGHT=0.73, MFG_NAME01="VISHAY INTERTECHNOLOGY", MFG_PN01=MSS1P3L-M3/89A
D5 D6 D7 D8 D9 D14: library part BV05C
J5 J6: library part CONN_HDR_8X1, "CON 1X8 SKT TH 100MIL SP 344H AU 118L", Temp Range="-40°C to +105°", 3D_Mechanical_Footprint_File=http://fcl.am.freescale.net/ALLEGRO/step/con_1x8_skt_2p54_th_126l.STEP, AGILE_PN=210-81617, CAD_APPROVED=Yes, CLASS=IO, FPLIST=con_1x8_skt_2p54_th_126l,con_1x8_skt_2p54_th, HEIGHT=8.75mm, MFG_NAME01="ANYTRONIC CORPORATION LIMITED", MFG_PN01="08001S3 0811-29RF", RoHS=NULL
J15: library part CONN_HDR_5X1, "HDR 1X5 RA TH 100MIL 108H AU 120L", Contact Voltage=-, Package Type="Through Hole, Right Angle", Temp Range="-40° C to + 105°", 3D_Mechanical_Footprint_File=http://fcl.am.freescale.net/ALLEGRO/step/con1x5_2p54_th_ra.STEP, AGILE_PN=210-10219, ASSY_OPT=DNP, CAD_APPROVED=Yes, CLASS=IO, HEIGHT=2.74MM, MFG_NAME01="SULLINS ELECTRONICS CORP", MFG_PN01=PRPC005SGAN-M71RC, RoHS=NULL, SILK=SWD
JP1: library part "Header 10", "10P接插件"
JP2: library part "Header 4", "4P接插件"
L3: library part INDUCTOR_FERRITE, "IND FER BEAD 100 OHM@100MHz 0.5A 25% AEC-Q200 0603", Package Size=0603, Temp Range="-55°C to 125°", 3D_Mechanical_Footprint_File=http://fcl.am.freescale.net/ALLEGRO/step/ind_1p8x1mm_sm.step, AGILE_PN=180-10207, CAD_APPROVED=Yes, CLASS=DISCRETE, HEIGHT=1mm, MFG_NAME01="WURTH ELEKTRONIK EISOS GMBH & CO. KG (ELECTRONIC & ELECTROMEHANICAL COMP)", MFG_PN01=742792620, RoHS=NULL
Q1: library part TRAN_NPN_SOT223, "TRANS NPN 80V 1A AEC-Q101 SOT223", Temp_Range="-55°C ~ 150°", AGILE_PN=480-79956, CAD_APPROVED=Yes, CLASS=IC, HEIGHT=1.8, MFG_NAME01=NEXPERIA, MFG_PN01=BCP56-16TX, RoHS=Yes, Temp Range="-55°C ~ 150°"
R1 R2 R4 R5 R9 R10 R15 R18 R22 R66 R80: library part RES, "RES MF ZERO OHM 1/10W -- 0603", Temp Range="¨C55 ¡ãC to +155 ¡", AGILE_PN=470-80866, CAD_APPROVED=Yes, CLASS=DISCRETE, FPLIST=RC0603_OV,RC0603,R603-X2,r603-x2_b,0603_CC,IND_0603HP_NSP,CC0603_OV_NSP, HEIGHT=0.6
  R1 R2 R4 R5 R9 R10 R15 R22: MFG_NAME01="YAGEO AMERICA", MFG_PN01=RC0603FR-070RL, PCB Footprint=RC0603_OV, RoHS=Yes
  R18: ASSY_OPT=DNP, MFG_NAME01=VISHAY, MFG_PN01=CRCW06030000Z0EAC, RoHS=NULL
  R66 R80: MFG_NAME01=VISHAY, MFG_PN01=CRCW06030000Z0EAC, RoHS=NULL
R3: library part RES, "RES MF 470 OHM 1/16W 5% 0402", Tolerance=5%, AGILE_PN=470-30315, CAD_APPROVED=Yes, CLASS=DISCRETE, FPLIST=RC0402_25,RC0402_HD,0402_CC, HEIGHT=0.45, MFG_NAME01=PANASONIC, MFG_PN01=ERJ2GEJ471X, RoHS=Yes
R6 R11 R12 R42 R155 R156 R174 R218: library part RES, "RES MF ZERO OHM 1/10W -- 0603", Temp Range="¨C55 ¡ãC to +155 ¡", VOLTAGE=1/16W, AGILE_PN=470-80866, CAD_APPROVED=Yes, CLASS=DISCRETE, FPLIST=RC0603_OV,RC0603,R603-X2,r603-x2_b,0603_CC,IND_0603HP_NSP,CC0603_OV_NSP, HEIGHT=0.6, MFG_NAME01=VISHAY, MFG_PN01=CRCW06030000Z0EAC, RoHS=NULL
R7 R17 R19 R23 R24 R25 R26 R289 R290: library part RES2
R8 R13 R16 R138 R141 R143 R144: library part RES, "RES MF 470 OHM 1/16W 5% 0402", Temp_Range="-55&#8451; to 155&#8451;", Tolerance=5%, AGILE_PN=470-30315, CAD_APPROVED=Yes, CLASS=DISCRETE, FPLIST=RC0402_25,RC0402_HD,0402_CC, HEIGHT=0.45, MFG_NAME01=PANASONIC, MFG_PN01=ERJ2GEJ471X, RoHS=Yes, SIGNAL_MODEL=DEFAULT_RESISTOR_430.000000OHM_2_1, TOL=1%
R14: library part RES, "RES MF 2.2K 1/16W 1% 0402", Temp_Range="-55C to +155C", Temp Range="-55 °C to +155 °", 3D_Mechanical_Footprint_File=http://fcl.am.freescale.net/ALLEGRO/step/rc0402_25.STEP, AGILE_PN=470-83213, CAD_APPROVED=yes, CLASS=DISCRETE, FPLIST=RC0402_25,RC0402_HD,0402_CC, HEIGHT=0.4mm, MFG_NAME01="Bourns Inc.", MFG_PN01=CR0402-FX-2201GLF, RoHS=NULL
R27 R35 R93 R99 R105 R137 R139 R140 R275 R281: library part RES, "RES MF 10K 1/16W 5% 0402", Temp_Range="?5 °C to +155 °", Tolerance=5%, AGILE_PN=470-75557, CAD_APPROVED=Yes, CLASS=DISCRETE, FPLIST=RC0402_25,RC0402_HD,0402_CC, HEIGHT=0.4MM, MFG_NAME01=BOURNS, MFG_PN01=CR0402-JW-103GLF, RoHS=NULL, SIGNAL_MODEL=DEFAULT_RESISTOR_10000OHM_2_1, TOL=5%
  R35 R93 R99 R105 R275 R281: ASSY_OPT=DNP
R37 R94 R97 R100 R103 R106 R107 R134 R276 R279 R282 R283: library part RES, "RES MF 62 OHM 1/4W 1% AEC-Q200 0805", Package Size="0805 (2012 Metric)", Temp Range="-55 °C to +155 °", Tolerance=1%, 3D_Mechanical_Footprint_File=http://fcl.am.freescale.net/ALLEGRO/step/RC0805_OV.STEP, AGILE_PN=470-83214, CAD_APPROVED=Yes, CLASS=DISCRETE, FPLIST=RC0805_OV,RC0805,0805_CC, HEIGHT=0.60, MFG_NAME01="KOA SPEER", MFG_PN01=SG73P2ATTD62R0F, RoHS=Yes
R53: library part R
R54 R55: library part R, "贴片电阻", BOM名称=ÌùÆ, 学习资源=www.ooocke.
R56 R57 R58 R59: library part RES, "RES MF 49.9 OHM 1/16W 1% 0402", Tolerance=1%, AGILE_PN=470-75360, CAD_APPROVED=Yes, CLASS=DISCRETE, FPLIST=RC0402_25,RC0402_HD,0402_CC, HEIGHT=0.4, MFG_NAME01=BOURNS, MFG_PN01=CR0402-FX-49R9GLF, RoHS=Yes
R67: library part RES, "RES MF 1.5K 1/16W 1% 0402", Tolerance=1%, AGILE_PN=470-80487, CAD_APPROVED=Yes, CLASS=DISCRETE, FPLIST=RC0402_25,RC0402_HD,0402_CC, HEIGHT=0.4, MFG_NAME01=BOURNS, MFG_PN01=CR0402-FX-1501GLF, RoHS=Yes
R68 R69 R84 R85 R86 R87 R88 R89 R90 R145 R146: library part RES, "RES MF 4.7K 1/16W 5% 0402", Tolerance=5%, AGILE_PN=470-75626, CAD_APPROVED=Yes, CLASS=DISCRETE, FPLIST=RC0402_25,RC0402_HD,0402_CC,RC0402_X2, HEIGHT=0.41, MFG_NAME01=BOURNS, MFG_PN01=CR0402-JW-472GLF, Pkg=0402, RoHS=NULL
  R84 R85 R86 R87 R88 R89: ASSY_OPT=DNP
R72 R73 R74 R76 R78 R79: library part RES, "RES MF 33.0 OHM 1/16W 1% 0402", Tolerance=1%, AGILE_PN=470-75790, CAD_APPROVED=Yes, CLASS=DISCRETE, FPLIST=RC0402_25,RC0402_HD,RC0402_X2,0402_CC, HEIGHT=0.4, MFG_NAME01=VISHAY, MFG_PN01=CRCW040233R0FKEDC, RoHS=Yes
R81: library part RES, "RES MF 10K 1/16W 5% 0402", Tolerance=5%, AGILE_PN=470-75557, CAD_APPROVED=Yes, CLASS=DISCRETE, FPLIST=RC0402_25,RC0402_HD,0402_CC, HEIGHT=0.4MM, MFG_NAME01=BOURNS, MFG_PN01=CR0402-JW-103GLF, RoHS=NULL
R82: library part RES, "RES MF 12.1K 1/16W 1% 0402", Tolerance=1%, AGILE_PN=470-76098, CAD_APPROVED=Yes, CLASS=DISCRETE, FPLIST=RC0402_25,RC0402_HD,0402_CC, HEIGHT=0.4, MFG_NAME01=BOURNS, MFG_PN01=CR0402-FX-1212GLF, RoHS=Yes
R98 R104 R108 R274 R280 R284: library part RES, "RES MF 100K 1/16W 1% 0402", Tolerance=1%, AGILE_PN=470-76240, CAD_APPROVED=Yes, CLASS=DISCRETE, FPLIST=RC0402_25,RC0402_HD,0402_CC, HEIGHT=0.4, MFG_NAME01="VISHAY INTERTECHNOLOGY", MFG_PN01=CRCW0402100KFKEDC, RoHS=Yes
SW1 SW2 SW3: library part SW_PSHBT_SPST_2, "SW SP PB 50mA 16V SMT", Temp Range="-40C to +85C", 3D_Mechanical_Footprint_File=http://fcl.am.freescale.net/ALLEGRO/step/sw4_4p15_4p2x3p2_sm.STEP, AGILE_PN=510-78653, CAD_APPROVED=Yes, CLASS=IC, HEIGHT=2.60, MFG_NAME01="WURTH ELEKTRONIK EISOS GMBH & CO. KG (ELECTRONIC & ELECTROMEHANICAL COMP)", MFG_PN01=434123025826, RoHS=Yes
  SW1: SILK=RESET
  SW2: SILK=WAKEUP
  SW3: SILK=USER
TP24 TP25 TP26 TP27: library part TESTLOOP, "TEST POINT PAD 30MIL DIA SMT, NO PART TO ORDER", 3D_Mechanical_Footprint_File=http://fcl.am.freescale.net/ALLEGRO/step/tpad_030.STEP, AGILE_PN=211-76642, CAD_APPROVED=Yes, CLASS=IO, HEIGHT=0.1, MFG_NAME01=NOTACOMPONENT, MFG_PN01=NOTACOMPONENT, RoHS=Yes
  TP24: SILK=INT
  TP25: SILK=TXCLK
  TP26: SILK=CRS
  TP27: SILK=RXDV
U1: library part MCXE318MPB_172P, "IC MCU 4M FLASH 2.97-5.5V 160MHZ HDQFP172", Temp Range="-40°C to +125°", 3D_Mechanical_Footprint_File=http://fcl.am.freescale.net/ALLEGRO/step/hdqfp172_0P65_16X16_sm.STEP, AGILE_PN=TMP-CIP-19819, CAD_APPROVED=Yes, CLASS=IC, HEIGHT=1.75mm, MFG_NAME01="NXP SEMICONDUCTOR", MFG_PN01=MCXE31BMPB, PRE_APN=344-10070, RoHS=NULL
U2: library part XC6227C_5P, "IC VREG LDO  3.3V 0.7A 1.7-6.0V SOT-89-5", Temp Range="-40°C to 85°", VOLTAGE="1.7V ~ 6.0V", 3D_Mechanical_Footprint_File=http://fcl.am.freescale.net/ALLEGRO/step/sot89-5.STEP, AGILE_PN=315-80827, CAD_APPROVED=Yes, CLASS=IC, HEIGHT=1.6mm, MFG_NAME01=TOREX, MFG_PN01=XC6227C331PR-G, RoHS=NULL
U3 U4 U5 U11 U12 U13: library part TJA1051TK_3_HVSON8, "IC XCVR CAN 4.5-5.5V AEC-Q100 HVSON8", Package Size=HVSON-8, Supply Voltage="4.5 V to 5.5 V", 3D_Mechanical_Footprint_File=http://fcl.am.freescale.net/ALLEGRO/step/son8_0p65_3p15x3p15.STEP, AGILE_PN=312-10381, CAD_APPROVED=Yes, CLASS=IC, HEIGHT=1mm, MFG_NAME01="NXP Semiconductor", MFG_PN01=TJA1057BTK/0J, RoHS=NULL
U7: JLCPCB Part Class=扩展, Manufacturer=WCH(南京沁, AddInBom=yes, ConvertToPcb=yes, Datasheet=https://atta.szlcsc.com/upload/public/pdf/source/20210823/518548123B20D2A3F85102F56E355BAB.pdf, Device=CH9143, FootprintName=QFN-28_L4.0-W4.0-P0.40-BL-EP2.7, LCSC Part Name=CH9143, Manufacturer Part=CH9143, ModelId=11f4b67ac5604b8a9b305e4266e81461, ModelName=QFN-28_L4.0-W4.0-H0.9-P0.40-BL-EP, ModelTransform=157.48,157.48,0,90,0,0,0,0,0, Supplier=LCSC, Supplier Footprint=QFN-28-EP(4x4), Supplier Part=C2887252, Symbol=CH9143
U10: library part LAN8710, "IC XCVR ETHERNET PHY MII/RMII 1.8-3.3V SQFN32", Package Size=SQFN-32, Supply Voltage=1.8-3.3V, Temp Range="-0C to +70C", 3D_Mechanical_Footprint_File=http://fcl.am.freescale.net/ALLEGRO/step/qfn32ep.STEP, AGILE_PN=312-83484, CAD_APPROVED=Yes, CLASS=IC, HEIGHT=1, MFG_NAME01="Microchip Technology", MFG_PN01=LAN8741A-EN, RoHS=Yes
USB1: "连接器类型:Type-C;标准:-;公母:母;端口数量:1;触点数量:16P;安装方式:卧贴;额定电流 - 电源:3A;工作温度范围:-40℃~+"
X1: library part XL7EL89CKI-111YLC-32M, "晶振类型:贴片晶振;频率:32MHz;常温频差:±10ppm;外接负载电容:8pF;频率稳定度(全温):±20ppm;"
Y1: library part XTAL_13, "XTAL 16MHz 8pF 15PPM 3225 SMT", Frequency Tolerance=±15ppm, Package Size="3.2 mm x 2.5 mm x 0.6 mm", Temp Range="-30C to +85C", 3D_Mechanical_Footprint_File=http://fcl.am.freescale.net/ALLEGRO/step/xtal4_cx3225ca_sm.STEP, AGILE_PN=230-10068, CAD_APPROVED=Yes, CLASS=IC, HEIGHT=0.6mm, MFG_NAME01=KYOCERA, MFG_PN01=CX3225SB16000D0GLLCC, RoHS=NULL
Y2: library part CRYSTAL, "XTAL 32.768kHz 12.5pF 1.05pF 20ppm SMT", 3D_Mechanical_Footprint_File=http://fcl.am.freescale.net/ALLEGRO/step/xtal2-3p2x1p5-sm.step, AGILE_PN=230-78676, CAD_APPROVED=Yes, CLASS=IC, HEIGHT=0.9, MFG_NAME01="Wurth Electronics Inc.", MFG_PN01=830009678, RoHS=Yes
Y3: library part OSC_ASFL, "OSC XO 50MHZ 3.3V SMD", Package Size="3.2 mm x 2.5 mm", Temp Range="-40  °C + 85 °", AGILE_PN=230-78687, CAD_APPROVED=YES, CLASS=IC, HEIGHT=1, MFG_NAME01="ECS INC. INTERNATIONAL", MFG_PN01=ECS-2333-500-BN-TR, PCB Footprint=osc4_3p2x2p5_sm, RoHS=YES
J1: BOI=RJ45, DESIG="10/100 base TX LXT971A", DEV=CON_PULSE_J00-61, FAB=PULSE, REF=J00-0061NL, RoHS=YES, VAL=J00-0061NL

## Via types
v1: diameter 20, hole 12, TOP to BOTTOM, tented both sides, 319 vias

## Nets (pads, with @x,y where several pads share a name; then routed paths per layer and width w, separated by ;. In a path a pad name is that pad's centre, name@x,y a point inside that pad or via, vN(x,y) a via of type N, cw(c..) or ccw(c..) an arc to the next point about the centre after c; other vN are vias at no path point)
485-A: D8.2 D14.1 J13.2 R2.1 R4.1 U6.6 | length 954
  TOP w10: U6.6@15362.49,16347.5 15389.65,16347.5 15406.65,16364.5 15563.85,16364.5 ; v1(15565.3,16240) 15565.3,16290.35 D8.2@15564.5,16291.15 15571.46,16291.15 15563.85,16298.76 15563.85,16364.5 ; J13.2@15817.13,16324.5 15817.13,16388.59 15811.27,16394.45 15785.15,16394.45 15755.2,16364.5 15563.85,16364.5
  BOTTOM w10: D14.1@15564.5,16297.35 15565.3,16296.55 v1(15565.3,16240) ; R4.1@15709,16319 15711.75,16321.75 15814.38,16321.75 J13.2@15817.13,16324.5 15863.73,16371.1 R2.1@15908.15,16371.1
485-A_1: D6.2 D9.1 J2.2 R1.1 R9.1 U8.6 | length 1061.7
  TOP w8: U8.6@15362.49,17851.5 15386.72,17851.5 15399.16,17863.94 15399.16,17864.81 15403.85,17869.5 15433.35,17869.5 15441.95,17860.9 15441.95,17779.19 15454.84,17766.3 15588.8,17766.3 ; v1(15570.65,17630.4) 15570.65,17675.5 D6.2@15564.5,17681.65 15572.23,17681.65 15591.85,17701.27 15591.85,17763.25 15588.8,17766.3 ; J2.2@15817.13,17709 15817.13,17775.27 15812.44,17779.95 15710.89,17779.95 15697.24,17766.3 15588.8,17766.3
  BOTTOM w8: D9.1@15563.5,17688.35 15570.65,17681.2 v1(15570.65,17630.4) ; R9.1@15709,17686 15714,17686 15737,17709 J2.2@15817.13,17709 15890.2,17709 R1.1@15909.6,17728.4
485-B: D7.2 D14.2 J13.3 R2.2 R5.2 U6.7 | length 965.1
  TOP w10: U6.7@15362.49,16397.5 15389.65,16397.5 15406.65,16380.5 15565.4,16380.5 ; v1@15564.4,16522.35 v1(15564.5,16522.25) D7.2@15564.5,16481.21 15565.4,16480.31 15565.4,16380.5 ; J13.3@15817.13,16480.41 15817.13,16416.31 15811.27,16410.45 15778.53,16410.45 15748.57,16380.5 15565.4,16380.5
  BOTTOM w10: D14.2@15564.5,16466.65 v1(15564.5,16522.25) ; R5.2@15709,16463.5 15713.78,16468.28 15805.01,16468.28 J13.3@15817.13,16480.41 15866.44,16431.1 R2.2@15908.15,16431.1
485-B_1: D5.2 D9.2 J2.3 R1.2 R22.2 U8.7 | length 1065.7
  TOP w8: U8.7@15362.49,17901.5 15386.72,17901.5 15399.16,17889.06 15399.16,17888.19 15403.85,17883.5 15439.15,17883.5 15455.95,17866.7 15455.95,17784.99 15460.64,17780.3 15594.99,17780.3 ; v1(15571.55,17914.15) 15571.55,17868.9 D5.2@15564.5,17861.85 15572.23,17861.85 15591.85,17842.23 15591.85,17783.44 15594.99,17780.3 ; J2.3@15817.13,17864.91 15817.13,17798.64 15812.44,17793.95 15705.09,17793.95 15691.44,17780.3 15594.99,17780.3
  BOTTOM w8: D9.2@15563.5,17857.65 15571.55,17865.7 v1(15571.55,17914.15) ; R22.2@15709,17865 R22.2@15709,17865 15817.08,17864.95 J2.3@15817.13,17864.91 15830.67,17851.37 15874.98,17851.37 15909.1,17817.25 R1.2@15914.1,17817.25
485_RE: U1.134 U6.2 U6.3 | length 1279.8
  TOP w10: U1.134@14163.19,16927.48 14225.51,16927.48 14230.19,16922.8 v1(14232.9,16922.8) ; v1(14359.25,16922.5) 14381.85,16922.5 14906.85,16397.5 U6.2@15173.51,16397.5 U6.3@15173.51,16347.5
  BOTTOM w10: v1(14232.9,16922.8) 14358.95,16922.8 v1(14359.25,16922.5)
485_RE_1: U1.172 U8.2 U8.3 | length 1481.6
  TOP w8: U1.172@14163.19,17413.7 14163.19,17458.74 14178.3,17473.85 v1(14197.95,17473.85) ; v1(15072.4,17900.2) 15172.21,17900.2 U8.2@15173.51,17901.5 U8.3@15173.51,17851.5
  BOTTOM w8: v1(14197.95,17473.85) 14946.7,17473.85 15015.1,17542.25 15015.1,17871.5 15043.8,17900.2 v1(15072.4,17900.2)
485_TXD: R289.1 U6.4 | length 127.2
  TOP w10: R289.1@15054,16297.92 15173.09,16297.92 U6.4@15173.51,16297.5 U6.4@15178.85,16292.16
485_TXD_1: R23.1 U8.4 | length 100.2
  TOP w8: R23.1@15074.45,17802.5 15074.95,17802 15169.89,17802 U8.4@15171.95,17799.94
  TOP w10: U8.4@15171.95,17799.94 U8.4@15173.1,17798.79
CAN0_H: JP1.2 R94.1 U11.7 | length 637.8
  TOP w10: U11.7@14405.91,16410.98 14405.19,16410.26 14405.19,16395.19 14401.11,16391.12 14401.11,16303.45 14361.9,16264.23 14361.9,16195.96 14367.76,16190.1 JP1.2@14428.9,16190.1
  BOTTOM w10: JP1.2@14428.9,16190.1 14369.76,16190.1 14363.9,16195.96 14363.9,16279.69 14402.5,16318.29 14402.5,16409.52 14420.86,16427.88 R94.1@14433,16427.88
CAN0_L: JP1.3 R97.2 U11.6 | length 637.8
  TOP w10: JP1.3@14278.9,16190.1 14340.04,16190.1 14345.9,16195.96 14345.9,16270.86 14385.11,16310.08 14385.11,16391.12 14381.04,16395.19 14381.04,16410.26 U11.6@14380.32,16410.98
  BOTTOM w10: JP1.3@14278.9,16190.1 14338.04,16190.1 14343.9,16195.96 14343.9,16287.98 14382.5,16326.58 14382.5,16409.52 14364.14,16427.88 R97.2@14352,16427.88
CAN1_H: JP2.1 R100.1 U12.7 | length 607.8
  TOP w10: JP2.1@14109.2,18004.75 14170.34,18004.75 14176.2,17998.89 14176.2,17907.46 14180.29,17903.38 14180.29,17805.81 14176.21,17801.74 14176.21,17786.67 U12.7@14175.49,17785.95
  BOTTOM w10: JP2.1@14109.2,18004.75 14168.34,18004.75 14174.2,17998.89 14174.2,17888.07 14177.5,17884.77 14177.5,17783.76 14159.14,17765.4 R100.1@14147.25,17765.4
CAN1_L: JP2.2 R103.2 U12.6 | length 609.3
  TOP w10: U12.6@14201.08,17785.95 14200.36,17786.67 14200.36,17801.74 14196.29,17805.81 14196.29,17910.01 14192.2,17914.09 14192.2,17998.89 14198.06,18004.75 JP2.2@14259.2,18004.75
  BOTTOM w10: R103.2@14227.75,17763.9 14215.86,17763.9 14197.5,17782.26 14197.5,17893.05 14194.2,17896.35 14194.2,17998.89 14200.06,18004.75 JP2.2@14259.2,18004.75
CAN2_H: JP2.3 R106.1 U13.7 | length 617.5
  TOP w10: JP2.3@14409.2,18004.75 14470.34,18004.75 14476.2,17998.89 14476.2,17902.68 14471.17,17897.64 14471.17,17800.77 14467.09,17796.7 14467.09,17781.64 U13.7@14466.37,17780.91
  BOTTOM w10: JP2.3@14409.2,18004.75 14468.34,18004.75 14474.2,17998.89 14474.2,17883.94 14468.55,17878.29 14468.55,17779.27 14450.19,17760.91 R106.1@14439.55,17760.91
CAN2_L: JP2.4 R107.2 U13.6 | length 617.5
  TOP w10: U13.6@14491.96,17780.91 14491.24,17781.64 14491.24,17796.7 14487.17,17800.77 14487.17,17891.01 14492.2,17896.05 14492.2,17998.89 14498.06,18004.75 JP2.4@14559.2,18004.75
  BOTTOM w10: R107.2@14517.55,17760.91 14506.91,17760.91 14488.55,17779.27 14488.55,17870.01 14494.2,17875.66 14494.2,17998.89 14500.06,18004.75 JP2.4@14559.2,18004.75